# Allegro board F407_PACK_V11A.brd
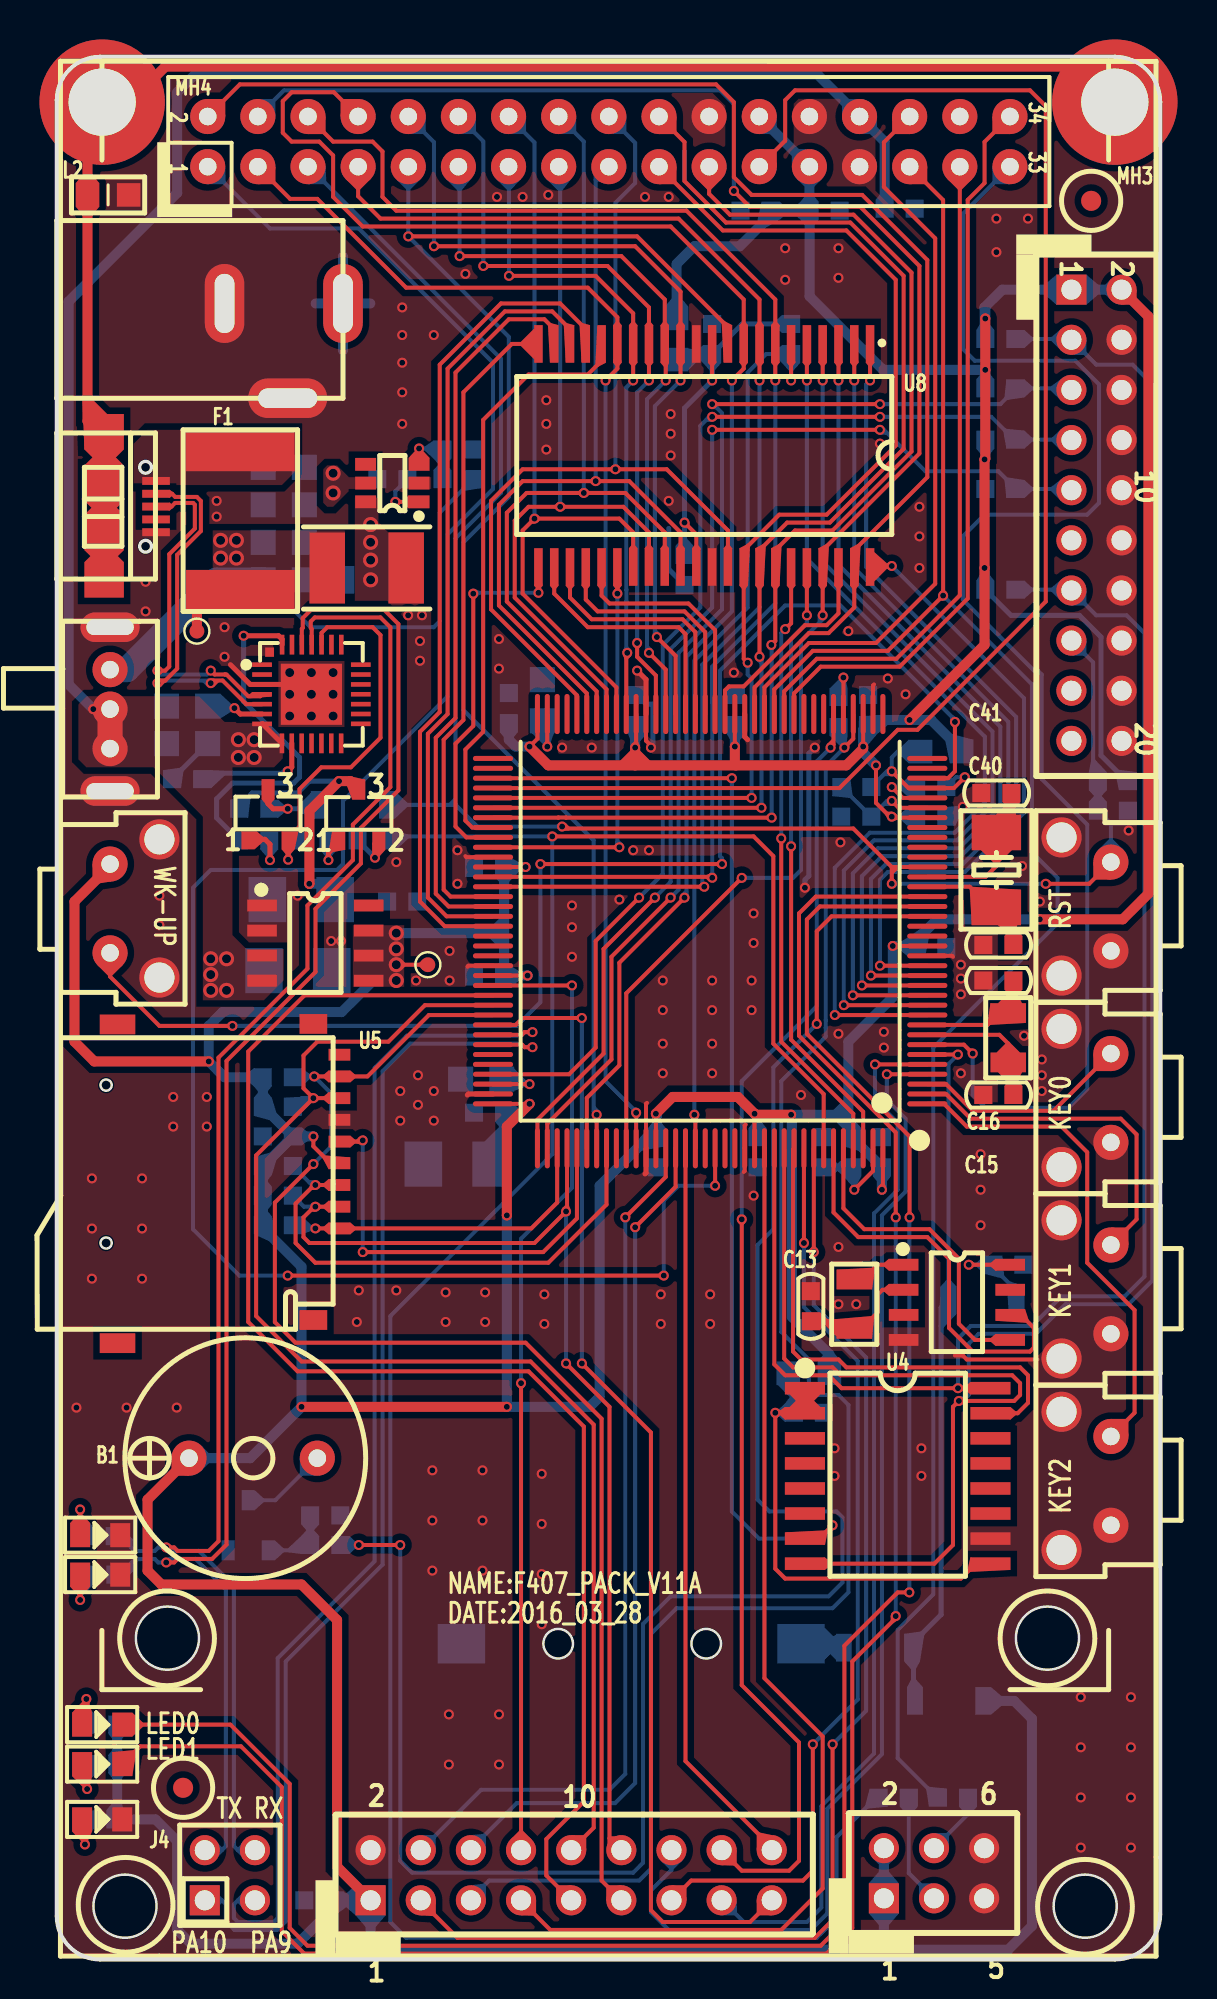
[diagram p0: board, top side]
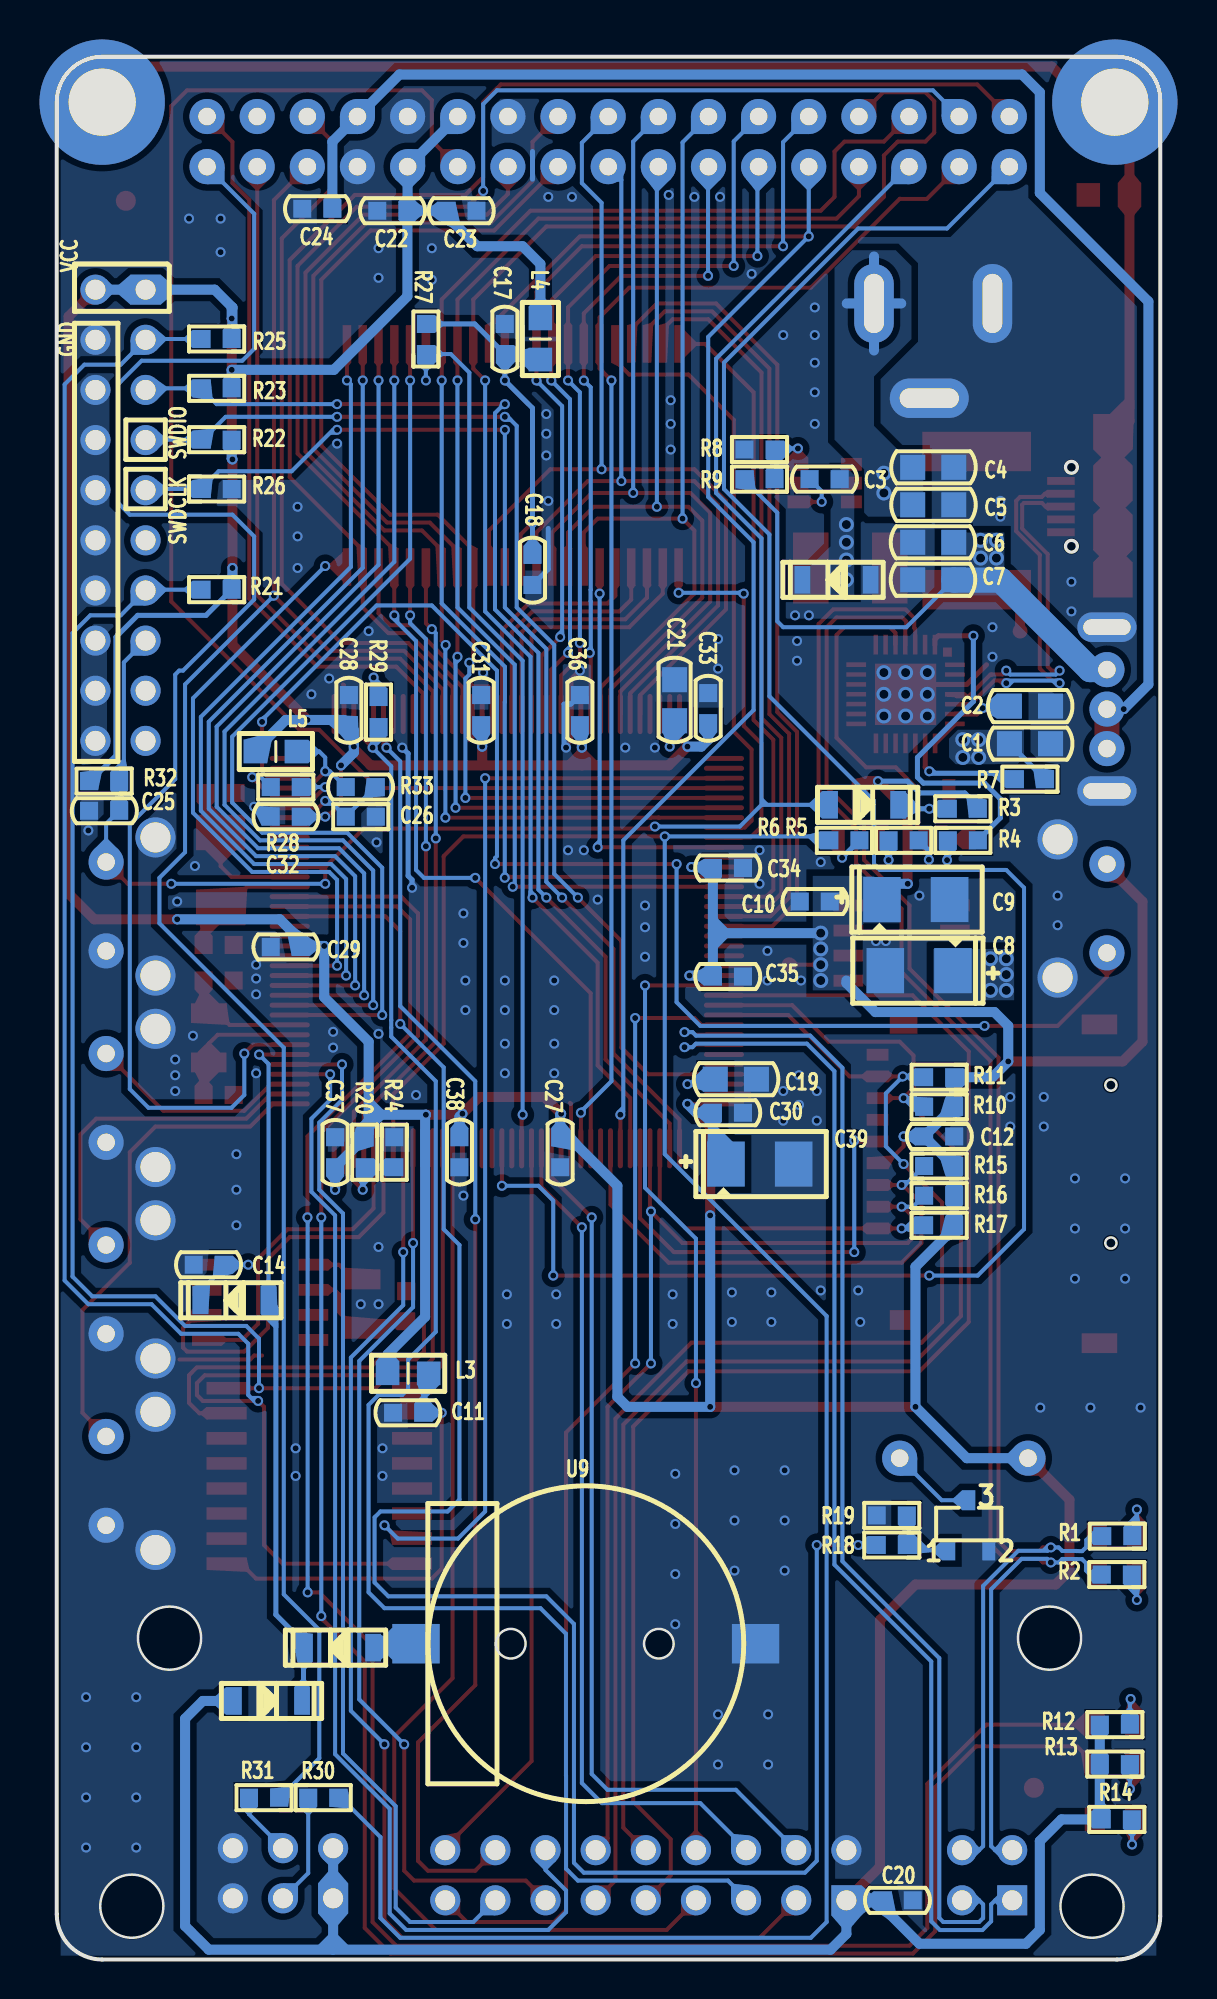
[diagram p1: board, bottom side, seen from below]

Outline 55.9 x 96.4 mm; copper layers: TOP, BOTTOM. Coordinates in mm from the lower left corner of the outline.
Outline path: 0,94.2 arc(0.64,95.76) 2.2,96.4 53.6,96.4 arc(55.23,95.73) 55.9,94.1 55.9,2.3 arc(55.23,0.67) 53.6,0 2.2,0 arc(0.64,0.64) 0,2.2 0,94.2

## Design rules (mm)
net group DP5: nets RXD TXD
net group DP10: nets PA9 PA10

## Placement (name value [footprint] x y rotation side)
B1  BEEP_HC12085P  [HC12085P]  6.7 25.4 0 top
C1  10uF_16V_0805_10%_X7R  [CC0805]  6.6 61.6 180 bottom
C2  10uF_16V_0805_10%_X7R  [CC0805]  6.6 63.5 180 bottom
C3  10nF_50V_0603_10%_X7R  [CC0603]  17 75 0 bottom
C4  10uF_16V_0805_10%_X7R  [CC0805]  11.5 75.6 180 bottom
C5  10uF_16V_0805_10%_X7R  [CC0805]  11.5 73.7 180 bottom
C6  10uF_16V_0805_10%_X7R  [CC0805]  11.5 71.8 0 bottom
C7  10uF_16V_0805_10%_X7R  [CC0805]  11.5 69.9 0 bottom
C8  10uF_10V_3528_10%  [CC3528_12]  10.5 50.1 0 bottom
C9  10uF_10V_3528_10%  [CC3528_12]  14.1 53.7 180 bottom
C10  0.1uF_50V_0603_10%_X7R  [CC0603]  17.5 53.6 180 bottom
C11  0.1uF_50V_0603_10%_X7R  [CC0603]  38.1 27.7 0 bottom
C12  0.1uF_50V_0603_10%_X7R  [CC0603]  11.2 41.7 180 bottom
C13  12pF_50V_0603_10%_X7R/NI  [CC0603]  38.2 33.1 270 top
C14  0.1uF_50V_0603_10%_X7R/NI  [CC0603]  48.2 35.2 0 bottom
C15  12pF_50V_0603_10%_C0G  [CC0603]  47.7 43.8 0 top
C16  12pF_50V_0603_10%_C0G  [CC0603]  47.7 49.6 0 top
C17  0.1uF_50V_0603_10%_X7R  [CC0603]  33.2 82.1 270 bottom
C18  0.1uF_50V_0603_10%_X7R  [CC0603]  31.8 70.4 270 bottom
C19  10uF_16V_0805_10%_X7R  [CC0805]  21.5 44.6 180 bottom
C20  0.1uF_50V_0603_10%_X7R  [CC0603]  13.3 3 0 bottom
C21  10uF_16V_0805_10%_X7R  [CC0805]  24.6 63.8 90 bottom
C22  0.1uF_50V_0603_10%_X7R  [CC0603]  38.9 88.6 180 bottom
C23  0.1uF_50V_0603_10%_X7R  [CC0603]  35.4 88.6 0 bottom
C24  0.1uF_50V_0603_10%_X7R  [CC0603]  42.7 88.7 180 bottom
C25  0.1uF_50V_0603_10%_X7R  [CC0603]  53.5 58.2 180 bottom
C26  0.1uF_50V_0603_10%_X7R  [CC0603]  40.5 59.4 0 bottom
C27  0.1uF_50V_0603_10%_X7R  [CC0603]  30.4 40.9 90 bottom
C28  0.1uF_50V_0603_10%_X7R  [CC0603]  41.1 63.3 270 bottom
C29  0.1uF_50V_0603_10%_X7R  [CC0603]  44.3 51.3 180 bottom
C30  0.1uF_50V_0603_10%_X7R  [CC0603]  21.9 42.9 0 bottom
C31  0.1uF_50V_0603_10%_X7R  [CC0603]  34.4 63.3 270 bottom
C32  0.1uF_50V_0603_10%_X7R  [CC0603]  44.3 57.9 180 bottom
C33  0.1uF_50V_0603_10%_X7R  [CC0603]  22.9 63.4 270 bottom
C34  0.1uF_50V_0603_10%_X7R  [CC0603]  21.9 55.3 0 bottom
C35  0.1uF_50V_0603_10%_X7R  [CC0603]  21.9 49.8 0 bottom
C36  0.1uF_50V_0603_10%_X7R  [CC0603]  29.4 63.3 270 bottom
C37  0.1uF_50V_0603_10%_X7R  [CC0603]  41.8 40.9 270 bottom
C38  0.1uF_50V_0603_10%_X7R  [CC0603]  35.5 40.9 90 bottom
C39  10uF_10V_3528  [CC3528_12]  22 40.3 180 bottom
C40  20pF_50V_0603_10%_C0G  [CC0603]  47.7 51.4 0 top
C41  20pF_50V_0603_10%_C0G  [CC0603]  47.6 59.1 0 top
D1  LED_GREEN_RX  [LED0805]  2.2 21.5 0 top
D2  LED_RED_TX  [LED0805]  2.2 19.5 0 top
D3  MBR0520_SOD123  [SOD123]  14.8 69.9 0 bottom
D4  LED_RED_DS0  [LED0805]  2.3 11.9 0 top
D5  LED_RED_DS1  [LED0805]  2.3 9.9 0 top
D6  LED_GREEN_POWER  [LED0805]  2.3 7.1 0 top
D7  MBR0520_SOD123  [SOD123]  45.3 33.4 0 bottom
D8  MBR0520_SOD123  [SOD123]  46.8 13.1 180 bottom
D9  MBR0520_SOD123  [SOD123]  40 15.8 0 bottom
D10  MBR0520_SOD123  [SOD123]  16.6 58.5 180 bottom
DC1  -  [DC005]  8.5 83.9 0 top
F1  JK300L  [SMD-7050]  9.3 69.4 90 top
J1  DIP2/10/2.54MM  [HEADER10X2]  51.4 84.6 270 top
J2  -  [OV2640]  15.9 3 0 top
J3  TFTLCD  [TFTLCD_3R5]  48.29 93.37 270 top
J4  CONN RCPT 2x2  [HEADER2X2]  7.5 3 0 top
J5  CONN RCPT 3x2  [HEADER3X2]  41.9 3.1 0 top
L1  6.8uH_CD4532_20%  [L4532-P]  15.7 70.5 180 top
L2  BEAD_BLM21PG600_0805  [LC0805]  2.6 89.4 0 top
L3  BEAD_BLM21PG600_0805  [LC0805]  38.1 29.7 180 bottom
L4  BEAD_BLM21PG600_0805  [LC0805]  31.4 82.1 270 bottom
L5  BEAD_BLM21PG600_0805  [LC0805]  44.8 61.2 0 bottom
MH3  Hold  [HOLD250D134]  53.6 94.1 0 top
MH4  Hold  [HOLD250D134]  2.3 94.1 0 top
MP1  MarkPoint  [MARKPOINT_R3]  6.4 8.7 0 top
MP2  MarkPoint  [MARKPOINT_R3]  52.4 89.1 0 top
NOREF  -  []  0 2.2 0 top
NOREF#2  -  []  2.6 0 90 top
Q1  8050_SOT23_NPN/NI  [SOT23_123]  10.71 58.02 0 top
Q2  8550_SOT23_PNP/NI  [SOT23_123]  15.3 58 0 top
Q3  8050_SOT23_NPN  [SOT23_123]  9.7 22 180 bottom
R1  1K_0603_1%  [RC0603]  2.18 21.45 180 bottom
R2  1K_0603_1%  [RC0603]  2.2 19.5 180 bottom
R3  10K_0603_1%/NI  [RC0603]  10 58.3 180 bottom
R4  1K_0603_1%/NI  [RC0603]  10 56.7 0 bottom
R5  1K_0603_1%/NI  [RC0603]  13 56.7 0 bottom
R6  1K_0603_1%/NI  [RC0603]  16 56.7 180 bottom
R7  10K_0603_1%  [RC0603]  6.6 59.8 180 bottom
R8  12K_0603_1%  [RC0603]  20.3 76.5 0 bottom
R9  62K_0603_1%  [RC0603]  20.3 75 180 bottom
R10  4.7K_0603_1%  [RC0603]  11.2 43.2 180 bottom
R11  4.7K_0603_1%  [RC0603]  11.2 44.7 180 bottom
R12  1K_0603_1%  [RC0603]  2.3 11.9 180 bottom
R13  1K_0603_1%  [RC0603]  2.3 9.9 180 bottom
R14  1K_0603_1%  [RC0603]  2.2 7.1 180 bottom
R15  4.7K_0603_1%  [RC0603]  11.2 40.2 0 bottom
R16  4.7K_0603_1%  [RC0603]  11.2 38.7 0 bottom
R17  4.7K_0603_1%  [RC0603]  11.2 37.2 0 bottom
R18  1K_0603_1%/NI  [RC0603]  13.6 21 180 bottom
R19  10K_0603_1%  [RC0603]  13.6 22.5 180 bottom
R20  0R_0603_1%  [RC0603]  40.3 40.9 90 bottom
R21  10K_0603_1%  [RC0603]  47.8 69.4 180 bottom
R22  10K_0603_1%  [RC0603]  47.8 77 180 bottom
R23  10K_0603_1%  [RC0603]  47.8 79.6 180 bottom
R24  0R_0603_1%/NI  [RC0603]  38.8 40.9 90 bottom
R25  10K_0603_1%  [RC0603]  47.8 82.1 180 bottom
R26  10K_0603_1%  [RC0603]  47.8 74.5 0 bottom
R27  10K_0603_1%  [RC0603]  37.2 82.1 270 bottom
R28  0R_0603_1%  [RC0603]  44.3 59.4 180 bottom
R29  0R_0603_1%/NI  [RC0603]  39.6 63.2 270 bottom
R30  10K_0603_1%  [RC0603]  42.4 8.2 0 bottom
R31  10K_0603_1%  [RC0603]  45.4 8.2 180 bottom
R32  20K_0603_1%  [RC0603]  53.5 59.7 180 bottom
R33  0R_0603_1%  [RC0603]  40.5 57.9 180 bottom
SW1  -  [SWITCH_3P]  2.7 67.5 270 top
SW2  WK_UP  [SW-6X6X6-L]  2.7 55.5 270 top
SW3  KEY0  [SW-6X6X6-L]  53.4 41.4 90 top
SW4  KEY1  [SW-6X6X6-L]  53.4 31.7 90 top
SW5  KEY2  [SW-6X6X6-L]  53.4 22 90 top
SW6  RST  [SW-6X6X6-L]  53.4 51.1 90 top
TP1  TestPoint  [TP-0R75]  7.1 67.3 0 top
TP2  TestPoint  [TP-0R75]  18.8 50.4 0 top
U1  CP2102  [QFN-28]  10.4 65.6 0 top
U2  RT8259  [SOT23-6]  17 74.8 90 top
U3  TPS76833Q  [SOIC8]  13.1 51.5 270 top
U4  W25Q128FVFIG  [SOIC16W]  42.6 24.5 0 top
U5  -  [TFCARD]  14 39.3 270 top
U6  PCF8563/NI  [SOIC8]  45.6 33.3 270 top
U7  STM32F407ZGT6  [LQFP144]  33.1 52.1 180 top
U8  IS62WV51216  [TSOP-44]  32.8 76.2 270 top
U9  BATTERY  [CR1220]  21.7 16 0 bottom
USB1  USB-MICRO_USB232  [USB-MICRO]  5.1 73.6 270 top
X1  XTAL_32768Hz_3215/NI  [X-2P-3R2X1R5-SMD]  40.4 33.2 90 top
X2  XTAL_32768Hz_3215  [X-2P-3R2X1R5-SMD]  48.2 46.7 270 top
X3  XTAL_8MHz_5062  [X-2P-5R0X3R2-SMD]  47.6 55.2 270 top

## Library data of the parts
B1 = BEEP_HC12085P
C1-C7 = CAPACITOR NON-POL
C8 C9 C39 = CAPT_100UF_3528_6r3V_10%_LXXXX
C10-C12 C14-C18 C20 C22-C38 C40 C41 = CAP NP
C13 = CAP
C19 C21 = C_Generic
D1 D2 D4-D6 = LED_4
D3 D8 D9 = DIODE13_0
D7 D10 = D SCHOTTKY
DC1 = DC005
F1 = FUSE
J1 = CON20_3
J2 = CONN RCPT 9x2
J3 = CONN RCPT 17x2_1
J4 = CONN RCPT 2x2
J5 = CONN RCPT 3x2
L1 L2 L4 = IND_BEAD_0805_600OHM_200MA
L3 L5 = INDUCTOR
MH3 MH4 = Hold_1
MP1 MP2 = MarkPoint
Q1 Q3 = L14G1/TO_1
Q2 = L14G1/TO_0
R1-R31 R33 = R_10k_0603
R32 = R_Generic
SW1 = SWITCH_3P
SW2-SW6 = SWITCH-SPST-4P
TP1 TP2 = TestPoint_0
U1 = CP2102
U2 = RT8259
U3 = TPS7133_0
U4 = W25Q64_0
U5 = TFCARD_1
U6 = PCF8563
U7 = STM32F407ZGT6_0
U8 = IS61LV25626_0
U9 = BATTERY
USB1 = USB-MICRO
X1 = XTAL
X2 X3 = XTAL_5032_0

## Footprints (pads in the part's own frame, mm; a bottom-side part is the same pattern mirrored in y, then rotated)
CC0603
  rect 0.914x0.914 smd: 1(-0.762,0) 2(0.762,0)
CC0805
  rect 1.27x1.27 smd: 1(-1.041,0) 2(1.041,0)
CC3528_12
  rect 1.905x2.286 smd: 1(0,0) 2(3.429,0)
CR1220
  rect 2.4x2 smd: 1(16,0) 2(-1.2,0)
DC005
  oval 2x4 hole 1x3: 1(6,0) 2(0,0)
  oval 4x2 hole 3x1: 3(3.2,-4.8)
HC12085P
  round 1.778 hole 0.889: 1(0,0) 2(6.5,0)
HEADER2X2
  rect 1.524x1.524 hole 1.016: 1(0,0)
  round 1.524 hole 1.016: 2(0,2.54) 3(2.54,0) 4(2.54,2.54)
HEADER3X2
  rect 1.524x1.524 hole 1.016: 1(0,0)
  round 1.524 hole 1.016: 2(0,2.54) 3(2.54,0) 4(2.54,2.54) 5(5.08,0) 6(5.08,2.54)
HEADER10X2
  rect 1.524x1.524 hole 1.016: 1(0,0)
  round 1.524 hole 1.016: 2(0,2.54) 3(2.54,0) 4(2.54,2.54) 5(5.08,0) 6(5.08,2.54) 7(7.62,0) 8(7.62,2.54) 9(10.16,0) 10(10.16,2.54) 11(12.7,0) 12(12.7,2.54) 13(15.24,0) 14(15.24,2.54) 15(17.78,0) 16(17.78,2.54) 17(20.32,0) 18(20.32,2.54) 19(22.86,0) 20(22.86,2.54)
HOLD250D134
  round 6.35 hole 3.404: 1(0,0)
L4532-P
  rect 1.8x3.6 smd: 1(-2,0) 2(2,0)
LC0805
  rect 1.194x1.194 smd: 1(-1.041,0) 2(1.041,0)
LED0805
  rect 1.016x1.219 smd: 1(-1.016,0) 2(1.016,0)
LQFP144
  oval 2.032x0.254 smd: 1(-11,8.75) 2(-11,8.25) 3(-11,7.75) 4(-11,7.25) 5(-11,6.75) 6(-11,6.25) 7(-11,5.75) 8(-11,5.25) 9(-11,4.75) 10(-11,4.25) 11(-11,3.75) 12(-11,3.25) 13(-11,2.75) 14(-11,2.25) 15(-11,1.75) 16(-11,1.25) 17(-11,0.75) 18(-11,0.25) 19(-11,-0.25) 20(-11,-0.75) 21(-11,-1.25) 22(-11,-1.75) 23(-11,-2.25) 24(-11,-2.75) 25(-11,-3.25) 26(-11,-3.75) 27(-11,-4.25) 28(-11,-4.75) 29(-11,-5.25) 30(-11,-5.75) 31(-11,-6.25) 32(-11,-6.75) 33(-11,-7.25) 34(-11,-7.75) 35(-11,-8.25) 36(-11,-8.75) 73(11,-8.75) 74(11,-8.25) 75(11,-7.75) 76(11,-7.25) 77(11,-6.75) 78(11,-6.25) 79(11,-5.75) 80(11,-5.25) 81(11,-4.75) 82(11,-4.25) 83(11,-3.75) 84(11,-3.25) 85(11,-2.75) 86(11,-2.25) 87(11,-1.75) 88(11,-1.25) 89(11,-0.75) 90(11,-0.25) 91(11,0.25) 92(11,0.75) 93(11,1.25) 94(11,1.75) 95(11,2.25) 96(11,2.75) 97(11,3.25) 98(11,3.75) 99(11,4.25) 100(11,4.75) 101(11,5.25) 102(11,5.75) 103(11,6.25) 104(11,6.75) 105(11,7.25) 106(11,7.75) 107(11,8.25) 108(11,8.75)
  oval 0.254x2.032 smd: 37(-8.75,-11) 38(-8.25,-11) 39(-7.75,-11) 40(-7.25,-11) 41(-6.75,-11) 42(-6.25,-11) 43(-5.75,-11) 44(-5.25,-11) 45(-4.75,-11) 46(-4.25,-11) 47(-3.75,-11) 48(-3.25,-11) 49(-2.75,-11) 50(-2.25,-11) 51(-1.75,-11) 52(-1.25,-11) 53(-0.75,-11) 54(-0.25,-11) 55(0.25,-11) 56(0.75,-11) 57(1.25,-11) 58(1.75,-11) 59(2.25,-11) 60(2.75,-11) 61(3.25,-11) 62(3.75,-11) 63(4.25,-11) 64(4.75,-11) 65(5.25,-11) 66(5.75,-11) 67(6.25,-11) 68(6.75,-11) 69(7.25,-11) 70(7.75,-11) 71(8.25,-11) 72(8.75,-11) 109(8.75,11) 110(8.25,11) 111(7.75,11) 112(7.25,11) 113(6.75,11) 114(6.25,11) 115(5.75,11) 116(5.25,11) 117(4.75,11) 118(4.25,11) 119(3.75,11) 120(3.25,11) 121(2.75,11) 122(2.25,11) 123(1.75,11) 124(1.25,11) 125(0.75,11) 126(0.25,11) 127(-0.25,11) 128(-0.75,11) 129(-1.25,11) 130(-1.75,11) 131(-2.25,11) 132(-2.75,11) 133(-3.25,11) 134(-3.75,11) 135(-4.25,11) 136(-4.75,11) 137(-5.25,11) 138(-5.75,11) 139(-6.25,11) 140(-6.75,11) 141(-7.25,11) 142(-7.75,11) 143(-8.25,11) 144(-8.75,11)
MARKPOINT_R3
  round 1.016 smd: 1(0,0)
OV2640
  rect 1.524x1.524 hole 1.016: 1(0,0)
  round 1.524 hole 1.016: 2(0,2.54) 3(2.54,0) 4(2.54,2.54) 5(5.08,0) 6(5.08,2.54) 7(7.62,0) 8(7.62,2.54) 9(10.16,0) 10(10.16,2.54) 11(12.7,0) 12(12.7,2.54) 13(15.24,0) 14(15.24,2.54) 15(17.78,0) 16(17.78,2.54) 17(20.32,0) 18(20.32,2.54)
QFN-28
  rect 1x0.23 smd: 1(0,0) 2(0,-0.5) 3(0,-1) 4(0,-1.5) 5(0,-2) 6(0,-2.5) 7(0,-3) 15(5.003,-2.998) 16(5.003,-2.498) 17(5.003,-1.998) 18(5.003,-1.498) 19(5.003,-0.998) 20(5.003,-0.498) 21(5.003,0.002)
  rect 0.23x1 smd: 8(1.006,-3.987) 9(1.506,-3.987) 10(2.006,-3.987) 11(2.506,-3.987) 12(3.006,-3.987) 13(3.506,-3.987) 14(4.006,-3.987) 22(4.014,1.016) 23(3.514,1.016) 24(3.014,1.016) 25(2.514,1.016) 26(2.014,1.016) 27(1.514,1.016) 28(1.014,1.016)
  rect 0.45x0.47 smd: 29(0.381,0.635)
  rect 3.1x3.1 smd: 30(2.5,-1.5)
RC0603
  rect 0.914x0.914 smd: 1(-0.762,0) 2(0.762,0)
SMD-7050
  rect 2x5.5 smd: 1(0,0) 2(7,0)
SOD123
  rect 0.8x1.4 smd: 1(-0.127,0) 2(3.327,0)
SOIC8
  rect 0.6x1.5 smd: 1(-1.9,-2.7) 2(-0.63,-2.7) 3(0.64,-2.7) 4(1.91,-2.7) 5(1.91,2.7) 6(0.64,2.7) 7(-0.63,2.7) 8(-1.9,2.7)
SOIC16W
  rect 2.032x0.635 smd: 1(-4.699,4.445) 2(-4.699,3.175) 3(-4.699,1.905) 4(-4.699,0.635) 5(-4.699,-0.635) 6(-4.699,-1.905) 7(-4.699,-3.175) 8(-4.699,-4.445) 9(4.699,-4.445) 10(4.699,-3.175) 11(4.699,-1.905) 12(4.699,-0.635) 13(4.699,0.635) 14(4.699,1.905) 15(4.699,3.175) 16(4.699,4.445)
SOT23-6
  rect 0.65x1.06 smd: 1(-0.95,-1.354) 2(0,-1.354) 3(0.95,-1.354) 4(0.95,1.354) 5(0,1.354) 6(-0.95,1.354)
SOT23_123
  rect 0.66x1.016 smd: 1(-1.016,-1.27) 2(1.016,-1.27) 3(0,1.27)
SW-6X6X6-L
  round 2.032 hole 1.524: 1(-1.25,2.5) 4(5.75,2.5)
  round 1.778 hole 0.889: 2(0,0) 3(4.5,0)
SWITCH_3P
  oval 1.5x3 hole 0.8x2.4: 1(0,0) 5(8.3,0)
  round 1.778 hole 0.889: 2(2.15,0) 3(4.15,0) 4(6.15,0)
TFCARD
  rect 0.6x1.1 smd: 1(2.26,0.32) 2(1.16,0.32) 3(0.06,0.32) 4(-1.04,0.32) 5(-2.14,0.32) 6(-3.24,0.32) 7(-4.34,0.32) 8(-5.44,0.32) 9(-6.54,0.32)
  rect 1x1.4 smd: 10(-8.1,-1) 13(6.9,-1)
  rect 1x1.8 smd: 11(-8.074,-10.922) 12(8.074,-10.922)
TFTLCD_3R5
  round 1.778 hole 0.889: 1(2.54,-40.64) 2(0,-40.64) 3(2.54,-38.1) 4(0,-38.1) 5(2.54,-35.56) 6(0,-35.56) 7(2.54,-33.02) 8(0,-33.02) 9(2.54,-30.48) 10(0,-30.48) 11(2.54,-27.94) 12(0,-27.94) 13(2.54,-25.4) 14(0,-25.4) 15(2.54,-22.86) 16(0,-22.86) 17(2.54,-20.32) 18(0,-20.32) 19(2.54,-17.78) 20(0,-17.78) 21(2.54,-15.24) 22(0,-15.24) 23(2.54,-12.7) 24(0,-12.7) 25(2.54,-10.16) 26(0,-10.16) 27(2.54,-7.62) 28(0,-7.62) 29(2.54,-5.08) 30(0,-5.08) 31(2.54,-2.54) 32(0,-2.54) 33(2.54,0) 34(0,0)
TP-0R75
  round 0.75 smd: 1(0,0)
TSOP-44
  rect 1.905x0.432 smd: 1(-5.65,8.4) 2(-5.65,7.6) 3(-5.65,6.8) 4(-5.65,6) 5(-5.65,5.2) 6(-5.65,4.4) 7(-5.65,3.6) 8(-5.65,2.8) 9(-5.65,2) 10(-5.65,1.2) 11(-5.65,0.4) 12(-5.65,-0.4) 13(-5.65,-1.2) 14(-5.65,-2) 15(-5.65,-2.8) 16(-5.65,-3.6) 17(-5.65,-4.4) 18(-5.65,-5.2) 19(-5.65,-6) 20(-5.65,-6.8) 21(-5.65,-7.6) 22(-5.65,-8.4) 23(5.65,-8.4) 24(5.65,-7.6) 25(5.65,-6.8) 26(5.65,-6) 27(5.65,-5.2) 28(5.65,-4.4) 29(5.65,-3.6) 30(5.65,-2.8) 31(5.65,-2) 32(5.65,-1.2) 33(5.65,-0.4) 34(5.65,0.4) 35(5.65,1.2) 36(5.65,2) 37(5.65,2.8) 38(5.65,3.6) 39(5.65,4.4) 40(5.65,5.2) 41(5.65,6) 42(5.65,6.8) 43(5.65,7.6) 44(5.65,8.4)
USB-MICRO
  rect 0.4x1.4 smd: 1(-1.31,-0.07) 2(-0.66,-0.07) 3(-0.01,-0.07) 4(0.64,-0.07) 5(1.29,-0.07)
  rect 1.8x2 smd: 6(-3.8,-2.7) 7(-1.2,-2.7) 8(1.3,-2.7) 9(3.7,-2.7)
X-2P-3R2X1R5-SMD
  rect 1x1.8 smd: 1(-1.25,0) 2(1.25,0)
X-2P-5R0X3R2-SMD
  rect 1.8x2.5 smd: 1(-1.9,0) 2(1.9,0)

## Nets
GND: C1.2 C2.2 C4.2 C5.2 C6.2 C7.2 C8.2 C9.2 C10.1 C11.2 C12.2 C13.1 C14.2 C15.1 C16.1 C17.1 C18.2 C19.2 C20.1 C21.2 C22.1 C23.1 C24.1 C25.1 C27.1 C28.1 C29.1 C30.1 C31.1 C32.1 C33.1 C34.1 C35.1 C36.1 C37.1 C38.1 C39.2 C40.1 C41.1 D1.2(CATHODE) D2.2(CATHODE) D3.1 D6.2(CATHODE) DC1.2 DC1.3 J1.4 J1.6 J1.8 J1.10 J1.12 J1.14 J1.16 J1.18 J1.20 J2.2(10) J3.22(GND_3) J3.26(GND_2) J3.27(GND_1) J5.5 J5.6 L2.2(B) Q3.2(E) R8.2 R19.1 R24.2 R26.1 R33.2 SW1.1 SW1.5 SW2.1 SW2.4 SW3.1 SW3.2 SW3.4 SW4.1 SW4.2 SW4.4 SW5.1 SW5.2 SW5.4 SW6.1 SW6.2 SW6.4 U1.3(GND_1) U1.29(GND_2) U1.30(GND_3) U2.2(GND) U3.1(GND) U3.2(E\N\) U4.10(GND) U5.6(GND) U6.4(VSS) U7.16(VSS_1) U7.38(VSS_2) U7.51(VSS_3) U7.61(VSS_4) U7.83(VSS_5) U7.94(VSS_6) U7.107(VSS_7) U7.120(VSS_8) U7.130(VSS_9) U8.12(GND_1) U8.34(GND_2) U9.2 USB1.5(GND)
GND_EARTH: L2.1(A) MH3.1 MH4.1 USB1.6(P_2) USB1.7(P_1) USB1.8(P_3) USB1.9(P_4)
VCC_3V3: B1.1(P) C9.1 C10.2 C12.1 C20.2 C22.2 C23.2 C27.2 C28.2 C29.2 C30.2 C31.2 C32.2 C33.2 C34.2 C35.2 C36.2 C37.2 C38.2 C39.1 D8.1 J1.1 J1.2 J2.1 J3.24(VDD_2) J3.25(VDD_1) J5.1 J5.2 L3.1 L4.1(A) L5.2 Q2.3(C) R3.2 R10.2 R11.2 R12.1 R13.1 R14.1 R15.1 R16.1 R17.1 R20.2 R21.2 R22.2 R23.2 R25.2 R32.1 SW2.2 TP2.1 U3.5(OUT_2) U3.6(OUT_1) U3.7(SENSE) U5.4(VCC) U7.17(VDD_1) U7.30(VDD_2) U7.39(VDD_3) U7.52(VDD_4) U7.62(VDD_5) U7.72(VDD_6) U7.84(VDD_7) U7.95(VDD_8) U7.108(VDD_9) U7.121(VDD_10) U7.131(VDD_11) U7.144(VDD_12)
VCC_5V: C1.1 C8.1 C24.2 J3.28(BL_VDD) R7.2 SW1.3 SW1.4 U1.7(REGIN) U1.8(VBUS) U3.3(IN_1) U3.4(IN_2)
VCC_5VOUT: C6.1 C7.1 F1.1 L1.2(B) R9.1 SW1.2 TP1.1
VCC_VBAT: D7.1 D8.2 D9.2 U7.6(VBAT)
VCC_VDDA: C26.2 L5.1 R28.1 U7.33(VDDA)
VCC_VUSB: F1.2 USB1.1(VBUS)
VSSA: C26.1 R33.1 U7.31(VSSA)
BEEP: R18.1 U7.20(PF8)
BOOT0: R6.1 R30.1 U7.138(BOOT0)
BOOT1: J3.29(MISO) R31.2 U7.48(PB2/BOOT1 (PB2))
DCMI_D0: J2.8(13) U7.96(PC6)
DCMI_D1: J2.9(5) U7.97(PC7)
DCMI_D5: J2.13(7) U7.136(PB6)
DCMI_D6: J2.14(16) U7.4(PE5)
DCMI_D7: J2.15(8) U7.5(PE6)
DCMI_HREF: J2.5(3) R29.2 U7.40(PA4)
DCMI_PCLK: J2.16(17) U7.42(PA6)
DCMI_PWDN: J2.18 U7.124(PG9)
DCMI_RESET: J2.7(4) U7.132(PG15)
DCMI_SCL: J2.4(11) U7.122(PD6)
DCMI_SDA: J2.6(12) U7.123(PD7)
DCMI_VSYNC: J2.3(2) U7.137(PB7)
DCMI_XCLK: J2.17(9) U7.100(PA8)
DTR: R4.1 U1.28(DTR)
FSMC_A0: U7.10(PF0) U8.5(A0)
FSMC_A1: U7.11(PF1) U8.4(A1)
FSMC_A2: U7.12(PF2) U8.3(A2)
FSMC_A3: U7.13(PF3) U8.2(A3)
FSMC_A4: U7.14(PF4) U8.1(A4)
FSMC_A5: U7.15(PF5) U8.44(A5)
FSMC_A6: J3.2(RS) U7.50(PF12) U8.43(A6)
FSMC_A7: U7.53(PF13) U8.42(A7)
FSMC_A8: U7.54(PF14) U8.27(A8)
FSMC_A9: U7.55(PF15) U8.26(A9)
FSMC_A10: U7.56(PG0) U8.25(A10)
FSMC_A11: U7.57(PG1) U8.24(A11)
FSMC_A12: U7.87(PG2) U8.22(A12)
FSMC_A13: U7.88(PG3) U8.21(A13)
FSMC_A14: U7.89(PG4) U8.20(A14)
FSMC_A15: U7.90(PG5) U8.19(A15)
FSMC_A16: U7.80(PD11) U8.18(A16)
FSMC_A17: U7.81(PD12) U8.23(A17)
FSMC_A18: U7.82(PD13) U8.28(A18)
FSMC_D0: J3.6(D0) U7.85(PD14) U8.7(I/O0)
FSMC_D1: J3.7(D1) U7.86(PD15) U8.8(I/O1)
FSMC_D2: J3.8(D2) U7.114(PD0) U8.9(I/O2)
FSMC_D3: J3.9(D3) U7.115(PD1) U8.10(I/O3)
FSMC_D4: J3.10(D4) U7.58(PE7) U8.13(I/O4)
FSMC_D5: J3.11(D5) U7.59(PE8) U8.14(I/O5)
FSMC_D6: J3.12(D6) U7.60(PE9) U8.15(I/O6)
FSMC_D7: J3.13(D7) U7.63(PE10) U8.16(I/O7)
FSMC_D8: J3.14(D8) U7.64(PE11) U8.29(I/O8)
FSMC_D9: J3.15(D9) U7.65(PE12) U8.30(I/O9)
FSMC_D10: J3.16(D10) U7.66(PE13) U8.31(I/O10)
FSMC_D11: J3.17(D11) U7.67(PE14) U8.32(I/O11)
FSMC_D12: J3.18(D12) U7.68(PE15) U8.35(I/O12)
FSMC_D13: J3.19(D13) U7.77(PD8) U8.36(I/O13)
FSMC_D14: J3.20(D14) U7.78(PD9) U8.37(I/O14)
FSMC_D15: J3.21(D15) U7.79(PD10) U8.38(I/O15)
FSMC_NBL0: U7.141(PE0) U8.39(L\B\)
FSMC_NBL1: U7.142(PE1) U8.40(U\B\)
FSMC_NE3: R27.2 U7.125(PG10) U8.6(C\S\1\)
FSMC_NE4: J3.1(LCD_CS) U7.127(PG12)
FSMC_NOE: J3.4(RD) U7.118(PD4) U8.41(O\E\)
FSMC_NWE: J3.3(WR/CLK) U7.119(PD5) U8.17(W\E\)
IIC_SCL: U6.6(SCL) U7.139(PB8)
IIC_SDA: U6.5(SDA) U7.140(PB9)
JTAG_TCLK: J1.9 R26.2 U7.109(PA14 (JTCK/SWCLK))
JTAG_TDI: J1.5 R23.1 U7.110(PA15 (JTDI))
JTAG_TMS: J1.7 R22.1 U7.105(PA13 (JTMS-SWDIO))
KEY0: SW3.3 U7.3(PE4)
KEY1: SW4.3 U7.2(PE3)
KEY2: SW5.3 U7.1(PE2)
LCD_BL: J3.23(BL) U7.76(PB15)
LED0: D4.2(CATHODE) U7.21(PF9)
LED1: D5.2(CATHODE) U7.22(PF10)
NRST: C25.2 D10.1 J1.15 J3.5(RST) R32.2 SW6.3 U7.25(NRST)
PA5: R29.1 U7.41(PA5)
PA9: J4.3 U7.101(PA9)
PA10: J4.1 U7.102(PA10)
PB0: J3.34(CLK) U7.46(PB0)
PB1: J3.31(T_PEN) U7.47(PB1)
PC13: J3.33(T_CS) U7.7(PC13)
PC14: C15.2 U7.8(PC14/OSC32_IN (PC14)) X2.2
PC15: C16.2 U7.9(PC15/ OSC32_OUT (PC15)) X2.1
PF11: J3.30(MOSI) U7.49(PF11)
RTS: Q1.2(E) R5.1 U1.24(RTS)
RXD: J4.4 R1.1 U1.25(RXD)
SDIO_CLK: U5.5(CLK) U7.113(PC12)
SDIO_CMD: R15.2 U5.3(CMD) U7.116(PD2)
SDIO_D0: J2.10(14) R10.1 U5.7(DAT0) U7.98(PC8)
SDIO_D1: J2.11(6) R11.1 U5.8(DAT1) U7.99(PC9)
SDIO_D2: R17.2 U5.1(DAT2) U7.111(PC10)
SDIO_D3: J2.12(15) R16.2 U5.2(DAT3) U7.112(PC11)
TXD: J4.2 R2.1 U1.26(TXD)
VREF+: R28.2 U7.32(VREF+)
W25QXX_CS: U4.7(C\S\) U7.75(PB14)
W25QXX_SPI_CLK: J1.13 R21.1 U4.16(CLK) U7.133(PB3 (JTDO/)
W25QXX_SPI_MISO: J1.3 R25.1 U4.8(DO) U7.134(PB4 (NJTRST))
W25QXX_SPI_MOSI: U4.15(DI) U7.135(PB5)
WK_UP: SW2.3 U7.34(PA0/WKUP (PA0))
N10964059: C13.2 U6.2(OSCO) X1.1
N11517045: C40.2 U7.23(PH0/OSC_IN (PH0)) X3.2
N11517097: C41.2 U7.24(PH1/OSC_OUT (PH1)) X3.1
N11518043: R20.1 R24.1 U7.143(PDR_ON)
N11518115: C19.1 U7.106(VCAP_2)
N11524608: C17.2 C18.1 L4.2(B) R27.1 U8.11(VDD_1) U8.33(VDD_2)
N11556832: U6.1(OSCI) X1.2
N11557131: C14.1 D7.2 U6.8(VDD)
N11560624: D4.1(ANODE) R12.2
N11560628: D5.1(ANODE) R13.2
N11560632: D6.1(ANODE) R14.2
N11623966: C21.1 U7.71(VCAP_1)
N11629153: C4.1 C5.1 DC1.1 U2.5(VIN)
N11629321: C3.1 D3.2 L1.1(A) U2.6(PHASE)
N11629345: R8.1 R9.2 U2.3(FB)
N11637754: U1.4(D+) USB1.3(D+)
N11637758: U1.5(D-) USB1.2(D-)
N11638713: C2.1 U1.6(VDD)
N11638764: R7.1 U1.9(R\S\T\)
N11638791: D1.1(ANODE) R1.2
N11764026: C11.1 L3.2 U4.1(H\O\L\D\) U4.2(VCC) U4.9(W\P\)
N11774127: D2.1(ANODE) R2.2
N11779339: Q3.1(B) R18.2 R19.2
N11779536: B1.2(G) Q3.3(C)
N11799005: Q1.1(B) R4.2
N11799595: Q2.1(B) R5.2
N11799717: Q2.2(E) R6.2
N11824757: D10.2 Q1.3(C) R3.1
N115355290: J5.4 R31.1
N115355295: J5.3 R30.2
N116292693: C3.2 U2.1(BOOT)
N117249130: D9.1 U9.1

Pads without a net: J1 11 17 19; J3 32; MP1 1; MP2 1; U1 1 2 10 11 12 13 14 15 16 17 18 19 20 21 22 23 27; U2 4; U3 8; U4 3 4 5 6 11 12 13 14; U5 9 10 11 12 13; U6 3 7; U7 18 19 26 27 28 29 35 36 37 43 44 45 69 70 73 74 91 92 93 103 104 117 126 128 129; USB1 4

## Via types
v1: diameter 0.508, hole 0.305, TOP to BOTTOM, 343 vias
v2: diameter 0.762, hole 0.457, TOP to BOTTOM, 32 vias

## Routing (per net, layer and track width the routed paths; a pad name or vN(x,y) marks a point on that pad's centre or on a via; arc(x,y) is an arc through that point)
GND: length 43.6
  TOP w0.203: 30,61.6 29.85,61.75 U7.61 ; 45.5,30.6 45.9,30.6 46.1,30.4 49.68,30.4 ; 29.9,43.4 29.85,43.35 U7.120 ; 20.8,50.3 20.85,50.35 U7.94 ; 45.4,50.8 45.35,50.85 U7.16 ; 34.8,39.9 34.85,39.95 U7.130 34.85,42.25 34.9,42.3 ; U7.38 41.35,64.55 41.4,64.6 ; U7.83 20.75,55.85 20.7,55.9
  TOP w0.254: 35,61.8 34.85,61.95 U7.51 ; 8.8,65.6 9.8,64.6 U1.3 12.4,64.6 v2(12.9,64.1) ; v1(29.4,65.3) 29.85,64.85 U7.61 ; 20.8,43.8 20.85,43.85 U7.107 ; U7.120 29.85,39.85 29.8,39.8
  BOTTOM w0.203: 46,58.5 v1(45.9,58.4) 45.4,57.9 C32.1
  BOTTOM w0.254: 31,72.5 31,70.44 C18.2 ; v1(37.9,54.3) 37.9,54.7 38.1,54.9 38.1,61.1 v1(38.4,61.4) ; C36.1 29.86,63.6 30.2,63.6 30.2,61.5 v1(30.1,61.4) ; 31.8,91.6 31.8,90.2
  vias: v1(1,27.96) v1(1.78,39.57) v1(1.78,37.03) v1(1.78,34.49) v1(3.54,27.96) v1(4.32,39.57) v1(4.32,37.03) v1(4.32,34.49) v1(4.5,69.8) v1(4.5,68.3) v1(5.2,53.9) v1(5.2,52.4) v1(5.9,43.7) v1(5.9,42.2) v1(6.08,27.96) v1(7.6,43.7) v1(7.6,42.2) v1(8.1,73.9) v1(8.1,73.1) v1(8.5,67.5) v1(8.5,66) v1(12.2,53.9) v1(13.9,51.6) v1(14.4,51.6) v1(15.2,32.3) v1(15.3,33.9) v1(17.2,55.6) v1(17.2,33.9) v1(17.4,44) v1(17.4,42.5) v1(17.5,83.7) v1(17.5,82.3) v1(17.5,80.9) v1(17.5,79.4) v1(17.5,77.8) v1(17.8,68.1) v1(18.2,49.6) v1(18.3,44.8) v1(18.3,43.3) v1(18.4,66.8) v1(18.4,65.8) v1(18.5,68.1) v1(19.03,24.78) v1(19.03,22.24) v1(19.03,19.7) v1(19.1,82.3) v1(19.1,44) v1(19.1,42.5) v1(19.7,33.8) v1(19.7,32.3) v1(19.9,51.1) v1(19.9,49.6) v1(19.86,12.42) v1(19.86,9.88) v1(20.3,56.2) v1(20.3,54.5) v1(20.7,85.4) v1(21.57,24.78) v1(21.57,22.24) v1(21.57,19.7) v1(21.7,33.8) v1(21.7,32.3) v1(22.3,89.3) v1(22.4,66.9) v1(22.4,65.4) v1(22.4,12.42) v1(22.4,9.88) v1(23.6,89.3) v1(24.57,24.61) v1(24.57,22.07) v1(24.57,19.53) v1(24.57,16.99) v1(24.7,33.7) v1(24.7,32.2) v1(24.8,79) v1(24.8,77.8) v1(24.8,76.5) v1(24.9,89.4) v1(25.6,61.4) v1(26.1,53.4) v1(26.1,52.3) v1(26.1,50.8) v1(27.1,61.4) v1(28.5,53.7) v1(29.2,56.2) v1(29.8,89.3) v1(30,56.2) v1(30.6,33.7) v1(30.6,32.2) v1(30.7,49.6) v1(30.7,48.1) v1(30.7,46.4) v1(30.7,44.9) v1(31,89.3) v1(31,73.9) v1(31.1,78.3) v1(31.1,77.3) v1(31.1,76.2) v1(33.1,33.7) v1(33.1,32.2) v1(33.2,49.6) v1(33.2,48.1) v1(33.2,46.4) v1(33.2,44.9) v1(34.3,65.2) v1(35.2,49.6) v1(35.2,48.1) v1(35.3,53) v1(35.3,51.5) v1(35.3,38.7) v1(36.9,86.7) v1(36.9,85.1) v1(37.7,43.8) v1(39.4,25.9) v1(39.4,24.5) v1(39.6,86.7) v1(39.6,85.2) v1(39.6,46.9) v1(39.6,36.1) v1(39.6,33.2) v1(39.7,56.6) v1(40.1,67.3) v1(40.5,33.2) v1(41.7,76.8) v1(41.9,47) v1(41.9,46.2) v1(42.1,64.9) v1(43,64.1) v1(43.7,73.6) v1(43.7,72.1) v1(43.7,70.5) v1(43.8,25.9) v1(43.8,24.5) v1(45.8,50.4) v1(45.8,49.7) v1(45.8,48.9) v1(45.8,44.9) v1(46.8,40.8) v1(46.8,39) v1(46.8,37.2) v1(47.6,88.2) v1(47.6,86.5) v1(48.9,55.4) v1(49,46.8) v1(49.2,88.2) v1(49.8,53.6) v1(49.9,45.6) v1(49.9,44.8) v1(49.9,44) v1(51.87,13.29) v1(51.87,10.75) v1(51.87,8.21) v1(51.87,5.67) v1(54.3,57.2) v1(54.41,13.29) v1(54.41,10.75) v1(54.41,8.21) v1(54.41,5.67) v2(11.8,65.2) v2(11.8,64.1) v2(11.8,63) v2(12.9,65.2) v2(12.9,63) v2(14,65.2) v2(14,64.1) v2(14,63)
GND_EARTH: length 77.8
  TOP w0.508: USB1.9 USB1.8 USB1.7 USB1.6 2.1,77.4 1.56,77.94 L2.1 1.56,93.36 MH4.1 3.7,94.1 5.5,95.9 51.8,95.9 MH3.1
VCC_3V3: length 474.2
  TOP w0.203: U7.144 41.85,39.05 v1(41.8,39) ; U7.30 42.35,57.85 v1(42.3,57.9) 42.2,57.9 41.5,58.6 v1(41.5,60.5) ; TP2.1 v2(17.2,50.4) ; U5.4 13.86,40.34 13,41.2 v1(13,41.7) ; U7.121 v1(30.35,42.85) ; U7.84 v1(23.75,55.35) ; U7.39 v1(40.85,61.45) ; v1(29.3,61.4) 29.35,61.45 U7.62 ; U7.95 v1(23.85,49.85) ; U7.131 v1(35.35,42.85) ; U7.52 v1(34.35,61.45) ; U7.17 v1(42.35,51.35) ; U7.72 24.35,61.85 v1(23.95,61.45) ; U7.108 v1(23.95,43.35)
  TOP w0.508: J1.2 55.3,83.24 55.3,54 54,52.7 v1(49.8,52.7) ; B1.1 4.6,23.3 4.6,19.7 5.3,19 12.4,19 14.2,17.2 14.2,4.7 J2.1 ; v1(23.95,61.45) 24.9,60.5 29.3,60.5 ; v1(43.2,62.8) 47,66.6 v1(47,70.5) v1(47,76) 47.04,76.04 v1(47.04,80.54) v1(47.04,83.14) ; v1(12.79,54.5) 12.8,54.51 12.8,58.2 v1(14.3,59.7) 14.87,59.7 Q2.3 ; v1(29.3,61.4) 29.3,60.5 ; 29.3,60.5 34.4,60.5 ; 34.4,60.5 40,60.5 40.85,61.35 v1(40.85,61.45) ; 34.4,60.5 34.35,60.55 v1(34.35,61.45) ; v1(22.8,28) v1(12.4,28) ; v1(22.8,37.7) 22.8,42.2 v1(23.95,43.35) ; SW2.2 2.7,55.4 0.9,53.6 0.9,46.5 1.9,45.5 v1(7.7,45.5) ; v1(37.2,42.8) 35.4,42.8 v1(35.35,42.85) 34.5,43.7 31.2,43.7 v1(30.35,42.85)
  BOTTOM w0.203: C32.2 v1(42.3,57.9)
  BOTTOM w0.254: R32.1 54.2,59.7 52.9,61 52.9,67 51.8,68.1 48.34,68.1 R21.2 ; R3.2 9.24,58.44 9.9,59.1 12.2,59.1 12.8,59.7 v1(14.3,59.7)
  BOTTOM w0.508: C33.2 22.9,61.8 23.25,61.45 v1(23.95,61.45) ; R12.1 R13.1 3.06,7.2 R14.1 5,7.1 6.1,6 6.1,1.5 6.8,0.8 12.2,0.8 14.06,2.66 C20.2 J2.1 15.9,1.3 16.7,0.5 41.9,0.5 ; C38.2 35.5,42.7 v1(35.35,42.85) ; v1(23.95,43.35) 23.5,42.9 C30.2 22.66,40.96 C39.1 ; C9.1 13.3,54.5 v1(12.79,54.5) ; 40.1,42.8 v1(37.2,42.8) 37.24,42.76 37.24,32.56 39.14,30.66 L3.1 ; 40.1,42.8 40.1,46.5 42.35,48.75 v1(42.35,51.35) 43.49,51.35 C29.2 43.54,51.64 44.6,52.7 v1(49.8,52.7) ; 40.1,42.8 40.1,41.86 R20.2 40.3,41.64 C37.2 v1(41.8,39) ; J5.2 J5.1 41.9,0.5 ; R25.2 47,82.14 47,83.7 ; v1(34.35,61.45) 34.35,62.49 C31.2 ; 22.66,52 C34.2 22.71,55.35 v1(23.75,55.35) ; 22.66,52 C35.2 22.71,49.85 v1(23.85,49.85) ; 22.66,52 v2(17.2,52) ; 41.9,0.5 48.2,0.5 49.4,1.7 49.4,12.2 48.5,13.1 D8.1 ; L4.1 31.4,85.9 32.3,86.8 34.6,86.8 36.16,88.36 C23.2 C22.2 ; R23.2 v1(47.04,80.54) 41.86,80.54 38.14,84.26 C22.2 ; J3.24 38.13,90.83 38.13,88.61 C22.2 ; J1.2 J1.1 47.9,84.6 47,83.7 ; v1(30.35,42.85) 30.4,42.8 C27.2 29.96,41.66 27.5,39.2 27.5,28.51 26.99,28 v1(22.8,28) v1(22.8,37.7) ; C12.1 10.46,40.2 R15.1 R16.1 R17.1 10.44,37.06 12.4,35.1 v1(12.4,28) 9.8,25.4 B1.1 ; C12.1 v1(13,41.7) ; C12.1 10.46,43.2 R10.2 R11.2 8.5,44.7 v1(7.7,45.5) 7.7,47.3 8.4,48 14.43,48 15.9,49.47 15.9,49.6 ; 47,83.7 47.04,83.66 v1(47.04,83.14) ; R21.2 47,69.44 v1(47,70.5) ; C36.2 29.3,62.44 v1(29.3,61.4) ; v1(41.5,60.5) 40.85,61.15 v1(40.85,61.45) 40.85,62.29 C28.2 41.36,62.8 v1(43.2,62.8) 44.3,62.8 45.84,61.26 L5.2 ; v1(47,76) 47.04,76.04 R22.2
  vias: v2(17.2,51.2) v2(17.2,49.6)
VCC_5V: length 81.9
  TOP w0.254: U1.8 10.42,62.6 U1.7
  TOP w0.508: SW1.3 v1(1.85,63.35)
  TOP w1.27: SW1.3 SW1.4
  BOTTOM w0.254: R7.2 5.84,59.8 C1.1
  BOTTOM w0.508: C24.2 41.94,92.1 J3.28 38.54,95.5 7,95.5 6.1,94.6 6.1,89.5 0.6,84 0.6,64.6 v1(1.85,63.35)
  vias: v2(7.8,50.7) v2(7.8,49.9) v2(7.8,49.1) v2(8.6,50.7) v2(8.6,49.1) v2(9.2,61.8) v2(9.2,60.9) v2(10,61.8) v2(10,60.9)
VCC_5VOUT: length 31.6
  TOP w0.508: F1.1 7.61,69.4 7.1,68.89 TP1.1
  BOTTOM w0.203: R9.1 21.06,74.96 19.4,73.3 19.4,67.8 19.1,67.5 12.86,67.5 C7.1
  BOTTOM w1.27: C7.1 10.44,69.88 8.08,69.88 3.55,65.35 SW1.2
  vias: v2(8.3,71.9) v2(8.3,71) v2(9.1,71.9) v2(9.1,71)
VCC_VBAT: length 35.3
  TOP w0.203: U7.6 v1(45.65,45.85)
  BOTTOM w0.203: D7.1 45.17,45.37 v1(45.65,45.85)
  BOTTOM w0.254: D7.1 44.8,33.03 44.8,17.47 43.43,16.1 43.43,15.9 D9.2 43.4,15.73 43.4,13.17 D8.2
VCC_VDDA: length 9.1
  TOP w0.203: v1(46,59.9) 45.45,59.35 U7.33 43.15,59.35 v1(42.3,60.2)
  BOTTOM w0.203: L5.1 42.6,61.2 42.3,60.9 v1(42.3,60.2) 42.06,60.2 C26.2 ; R28.1 45.56,59.9 v1(46,59.9)
VSSA: length 5.5
  TOP w0.203: v1(42.3,58.7) 42.65,58.35 U7.31
  BOTTOM w0.203: v1(42.3,58.7) 42.06,58.7 R33.1 39.76,59.4 C26.1
BEEP: length 98.8
  TOP w0.203: U7.20 39.25,52.85 38.5,52.1 v1(38.5,47.4) ; v1(17.4,21) v1(15.3,21)
  BOTTOM w0.203: v1(38.5,47.4) 36.3,45.2 36.3,37 35.5,36.2 35.5,23.3 36.1,22.7 39.5,22.7 39.8,22.4 39.8,19.1 39.1,18.4 31.1,18.4 29.7,17 29.7,4.9 29.2,4.4 18,4.4 17.4,5 v1(17.4,21) ; v1(15.3,21) R18.1
BOOT0: length 124.7
  TOP w0.203: U7.138 38.85,43.85 36.3,46.4 36.3,55.9 35.3,56.9 v1(25.1,56.9)
  BOTTOM w0.203: R30.1 41.5,8.2 39.5,6.2 39.5,2.1 38.5,1.1 17.7,1.1 16.9,1.9 16.9,32.6 25.1,40.8 v1(25.1,56.9) 16.96,56.9 R6.1
BOOT1: length 101.7
  TOP w0.203: J3.29 44.9,89.14 v1(44.9,69.1) 42.1,66.3 38.3,66.3 36.35,64.35 U7.48
  BOTTOM w0.203: v1(44.9,69.1) 49.4,64.6 49.4,56.1 50.7,54.8 50.7,52.5 44.4,46.2 44.4,18.5 42.6,16.7 42.6,10.2 44.6,8.2 R31.2
DCMI_D0: length 48.9
  TOP w0.203: U7.96 v1(26.1,49.35) ; v1(23.52,29.2) J2.8
  BOTTOM w0.203: v1(23.52,29.2) 23.52,36.52 26.1,39.1 v1(26.1,49.35)
DCMI_D1: length 71.8
  TOP w0.203: J2.9 24.8,4.26 24.8,6.1 26.7,8 26.7,27 23.9,29.8 12.2,29.8 9.7,32.3 9.7,46 12.55,48.85 U7.97
DCMI_D5: length 46.5
  TOP w0.203: v1(38.3,10.9) 38.3,4.5 37.8,4 32.14,4 J2.13 ; U7.136 v1(37.85,36.3)
  BOTTOM w0.203: v1(37.85,36.3) 37.85,33.05 40.58,30.32 40.58,13.18 v1(38.3,10.9)
DCMI_D6: length 59.8
  TOP w0.203: U7.4 v1(42.05,44.85)
  BOTTOM w0.203: J2.14 31.14,4.54 30.1,3.5 30.1,2.4 31,1.5 38.2,1.5 39.03,2.33 39.03,7.64 41.8,10.41 41.8,37.7 43,38.9 43,42.6 42.05,43.55 v1(42.05,44.85)
DCMI_D7: length 53.3
  TOP w0.203: U7.5 v1(41.45,45.35)
  BOTTOM w0.203: 41.4,45.4 v1(41.45,45.35) 41.45,43.55 42.6,42.4 42.6,39 41.4,37.8 41.4,10.44 38.73,7.77 38.73,2.63 38,1.9 34.8,1.9 33.7,3 J2.15
DCMI_HREF: length 81.9
  TOP w0.203: U7.40 40.35,61.85 v1(39.9,61.4)
  BOTTOM w0.203: J2.5 20.98,3.08 21.9,4 29.5,4 30.1,4.6 30.1,9.31 30.1,9.32 30.1,16.5 31.4,17.8 39.3,17.8 40.1,18.6 40.1,28.1 39.6,28.6 38.4,28.6 38.1,28.9 38.1,30.4 36.7,31.8 36.7,44.5 38.96,46.76 38.96,47.21 38.96,47.21 38.96,47.59 38.96,47.59 38.96,60.46 v1(39.9,61.4) 39.9,62.14 R29.2
DCMI_PCLK: length 65.8
  TOP w0.203: U7.42 39.35,61.55 v1(39.2,61.4) ; J2.16 33.68,5.52 34.7,4.5 37.1,4.5 37.6,5 37.6,11 34.7,13.9 v1(34.7,37.5)
  BOTTOM w0.203: v1(39.2,61.4) 38.5,60.7 38.5,48.3 34.7,44.5 v1(34.7,37.5)
DCMI_PWDN: length 37.4
  TOP w0.203: U7.124 31.85,10.05 36.22,5.68 J2.18
DCMI_RESET: length 55.5
  TOP w0.203: U7.132 35.85,14.25 38.8,11.3 38.8,3.6 36.7,1.5 25,1.5 23.52,2.98 J2.7
DCMI_SCL: length 44.5
  TOP w0.203: U7.122 30.85,39.65 v1(28.8,37.6)
  BOTTOM w0.203: J2.4 21.5,8.6 28,8.6 28.8,9.4 v1(28.8,37.6)
DCMI_SDA: length 42.8
  TOP w0.203: U7.123 31.35,39.15 v1(29.3,37.1)
  BOTTOM w0.203: J2.6 20.98,5.6 23.3,7.92 28.28,7.92 29.3,8.94 v1(29.3,37.1)
DCMI_VSYNC: length 62.9
  TOP w0.203: v1(39.3,10.9) 39.3,2 38.4,1.1 20.3,1.1 18.44,2.96 J2.3 ; U7.137 v1(38.35,35.84)
  BOTTOM w0.203: v1(39.3,10.9) 41,12.6 41,30.5 38.35,33.15 v1(38.35,35.84)
DCMI_XCLK: length 58.1
  TOP w0.203: J2.17 35.12,1.9 30.7,1.9 30.1,2.5 30.1,26.7 v1(26.6,30.2) ; U7.100 23.25,47.35 23.6,47.7 v1(26.6,47.7)
  BOTTOM w0.203: v1(26.6,47.7) v1(26.6,30.2)
DTR: length 17.9
  TOP w0.254: U1.28 11.41,66.89 11.23,67.07 v1(9.47,67.07)
  BOTTOM w0.254: v1(9.47,67.07) 9.47,63.73 12.3,60.9 12.3,59.9 12,59.6 8.9,59.6 8.1,58.8 8.1,57.84 R4.1
FSMC_A0: length 48.1
  TOP w0.203: U8.5 v1(38,80) ; U7.10 v1(39.41,47.85)
  BOTTOM w0.203: v1(38,80) 38,70.97 47.01,61.95 47.01,58.61 45.49,57.09 41.19,57.09 39.41,55.31 v1(39.41,47.85)
FSMC_A1: length 46.9
  TOP w0.203: U8.4 v1(38.8,80) ; U7.11 v1(39.87,48.35)
  BOTTOM w0.203: v1(38.8,80) 38.8,70.81 47.4,62.21 47.4,58.5 45.6,56.7 41.4,56.7 39.87,55.17 v1(39.87,48.35)
FSMC_A2: length 45.7
  TOP w0.203: U7.12 v1(40.33,48.85) ; U8.3 v1(39.6,80)
  BOTTOM w0.203: v1(39.6,80) 39.6,70.66 47.8,62.46 47.8,58.4 45.7,56.3 41.6,56.3 40.33,55.03 v1(40.33,48.85)
FSMC_A3: length 44.5
  TOP w0.203: U7.13 v1(40.79,49.35) ; U8.2 v1(40.4,80)
  BOTTOM w0.203: v1(40.4,80) 40.4,70.51 48.2,62.71 48.2,58.3 45.8,55.9 41.8,55.9 40.79,54.89 v1(40.79,49.35)
FSMC_A4: length 43.4
  TOP w0.203: U7.14 v1(41.24,49.85) ; U8.1 v1(41.2,80)
  BOTTOM w0.203: v1(41.2,80) 41,79.8 41,70.55 48.6,62.95 48.6,58.2 45.9,55.5 42,55.5 41.24,54.74 v1(41.24,49.85)
FSMC_A5: length 31.9
  TOP w0.203: U8.44 41.25,70.6 v1(42.3,70.6) ; U7.15 v1(41.7,50.35)
  BOTTOM w0.203: v1(41.7,50.35) 41.7,54.7 42.1,55.1 46,55.1 49,58.1 49,63.9 v1(42.3,70.6)
FSMC_A6: length 70.2
  TOP w0.203: U7.50 35.35,64.45 38.1,67.2 39.1,67.2 40.4,68.5 U8.43 40.4,71.4 44.1,75.1 44.1,86.1 40.8,89.4 35.2,89.4 34.3,90.3 34.3,94.1 33.4,95 9.28,95 7.65,93.37
FSMC_A7: length 10.9
  TOP w0.203: U7.53 33.85,64.3 34.05,64.5 34.8,64.5 37.9,67.6 39,67.6 39.6,68.2 U8.42
FSMC_A8: length 12.2
  TOP w0.203: U7.54 33.35,67.35 32,68.7 28,68.7 27.6,69.1 U8.27
FSMC_A9: length 12.5
  TOP w0.203: U7.55 32.85,67.25 31.8,68.3 27.4,68.3 26.8,68.9 U8.26
FSMC_A10: length 12.8
  TOP w0.203: U7.56 32.35,67.25 31.7,67.9 27.1,67.9 26,69 U8.25
FSMC_A11: length 12.9
  TOP w0.203: U8.24 25.2,69.2 26.9,67.5 31.5,67.5 31.85,67.15 U7.57
FSMC_A12: length 33.1
  TOP w0.203: U8.22 23.05,81.85 20.6,79.4 20.6,62.8 19.6,61.8 19.6,54.2 19.95,53.85 U7.87
FSMC_A13: length 37.1
  TOP w0.203: U8.21 25.2,82.6 24.7,83.1 22.9,83.1 20.2,80.4 20.2,62.9 19.2,61.9 19.2,54 19.85,53.35 U7.88
FSMC_A14: length 39.4
  TOP w0.203: U7.89 19.75,52.85 18.8,53.8 18.8,62.1 19.8,63.1 19.8,80.6 22.7,83.5 25.1,83.5 26,82.6 U8.20
FSMC_A15: length 41.8
  TOP w0.203: U7.90 19.65,52.35 18.4,53.6 18.4,62.2 19.4,63.2 19.4,80.8 22.5,83.9 25.5,83.9 26.8,82.6 U8.19
FSMC_A16: length 30.3
  TOP w0.203: U8.18 27.6,81 26.9,80.3 23.9,80.3 21.6,78 21.6,62.2 20.7,61.3 20.7,57.7 21.05,57.35 U7.80
FSMC_A17: length 18.9
  TOP w0.203: v1(21.1,69.2) 21.1,62.5 20.2,61.6 20.2,57.4 20.75,56.85 U7.81 ; v1(24.4,69.24) U8.23
  BOTTOM w0.203: v1(24.4,69.24) 21.14,69.24 v1(21.1,69.2)
FSMC_A18: length 20.6
  TOP w0.203: v1(28.4,69.2) U8.28 ; U7.82 v1(28.5,56.35)
  BOTTOM w0.203: v1(28.5,56.35) 28.4,56.45 v1(28.4,69.2)
FSMC_D0: length 70.6
  TOP w0.203: v1(33.2,54.81) 33.19,54.81 33.15,54.85 U7.85 ; 12.73,93.37 14,92.1 16,92.1 16.5,91.6 16.5,89.3 17.2,88.6 31.9,88.6 36.4,84.1 U8.7 v1(36.4,80)
  BOTTOM w0.203: v1(33.2,54.81) 33.2,63.7 33.2,63.71 33.2,65.5 36.4,68.7 v1(36.4,80)
FSMC_D1: length 65.7
  TOP w0.203: 15.27,90.83 15.27,89.33 16.4,88.2 31.5,88.2 35.6,84.1 U8.8 v1(35.6,80) ; U7.86 v1(32.8,54.35)
  BOTTOM w0.203: v1(32.8,54.35) 32.7,54.45 32.7,65.6 35.6,68.5 v1(35.6,80)
FSMC_D2: length 80.5
  TOP w0.203: v1(31.8,53.8) 28.5,50.5 28.5,45.3 26.85,43.65 U7.114 ; v1(34.2,80) 34.8,80.6 U8.9 34.8,84.1 31.1,87.8 15.5,87.8 14,89.3 14,91.4 13.3,92.1 11.9,92.1 11.45,92.55 11.45,94.15 11.9,94.6 14.04,94.6 15.27,93.37
  BOTTOM w0.203: v1(31.8,53.8) 31.9,53.9 31.9,66 34.2,68.3 v1(34.2,80)
FSMC_D3: length 74.5
  TOP w0.203: v1(17.81,87.3) 29.4,87.3 34,82.7 U8.10 ; U7.115 v1(27.35,42.8)
  BOTTOM w0.203: v1(27.35,42.8) 27.2,42.95 27.2,56.7 20.6,63.3 20.6,71.8 22.9,74.1 22.9,82.21 v1(17.81,87.3) J3.9
FSMC_D4: length 42.9
  TOP w0.203: v1(31.6,80) U8.13 31.6,84.5 29.3,86.8 v1(19.11,86.8) ; U7.58 31.35,66.05 v1(30.4,67)
  BOTTOM w0.203: v1(19.11,86.8) 19.11,92.07 J3.10 ; v1(31.6,80) 30.3,78.7 30.3,67.1 v1(30.4,67)
FSMC_D5: length 37.7
  TOP w0.203: v1(20.41,86.3) 28.6,86.3 30.8,84.1 U8.14 30.85,81.8 v1(30.85,80) ; U7.59 30.85,65.35 v1(30,66.2)
  BOTTOM w0.203: v1(20.41,86.3) 20.41,90.77 20.35,90.83 ; v1(30,66.2) 29.9,66.3 29.9,79.05 v1(30.85,80)
FSMC_D6: length 38.6
  TOP w0.203: v1(30,80) U8.15 30,83.7 27.9,85.8 v1(21.61,85.8) ; U7.60 30.35,65.05 29.4,66 v1(29.4,66.7)
  BOTTOM w0.203: v1(30,80) 29.4,79.4 v1(29.4,66.7) ; 20.35,93.37 21.61,92.11 v1(21.61,85.8)
FSMC_D7: length 33.1
  TOP w0.203: v1(22.91,85.3) 27.3,85.3 29.2,83.4 U8.16 v1(29.2,80) ; v1(28.9,66.2) 28.85,66.15 U7.63
  BOTTOM w0.203: v1(29.2,80) 28.85,79.65 28.85,69.4 28.86,69.39 28.86,68.81 28.85,68.8 28.85,66.25 v1(28.9,66.2) ; v1(22.91,85.3) 22.91,90.81 J3.13
FSMC_D8: length 40.1
  TOP w0.203: U8.29 29.2,72.3 28.5,73 v1(24.2,73) 23.6,72.4 23.6,69.2 28.35,64.45 U7.64
  BOTTOM w0.203: v1(24.2,73) 24.2,92.06 J3.14
FSMC_D9: length 38.4
  TOP w0.203: U7.65 27.85,64.35 23.2,69 23.2,72.9 23.9,73.6 v1(25.5,73.6) 28.7,73.6 30,72.3 U8.30
  BOTTOM w0.203: J3.15 25.5,90.76 v1(25.5,73.6)
FSMC_D10: length 42.7
  TOP w0.203: U7.66 27.35,64.25 22.8,68.8 22.8,73.3 23.8,74.3 v1(26.7,74.3) 28.8,74.3 30.8,72.3 U8.31
  BOTTOM w0.203: J3.16 26.7,92.1 v1(26.7,74.3)
FSMC_D11: length 41.2
  TOP w0.203: U7.67 26.85,64.15 22.4,68.6 22.4,73.7 23.6,74.9 v1(27.3,74.9) 29,74.9 31.6,72.3 U8.32
  BOTTOM w0.203: v1(27.3,74.9) 27.3,90.17 J3.17
FSMC_D12: length 47.2
  TOP w0.203: U7.68 26.35,64.05 22,68.4 22,73.9 23.6,75.5 v1(28.3,75.5) 30.9,75.5 34,72.4 U8.35
  BOTTOM w0.203: v1(28.3,75.5) 28.3,89 29.3,90 29.3,92.04 J3.18
FSMC_D13: length 58.5
  TOP w0.203: 30.51,90.83 33.74,87.6 40,87.6 42.5,85.1 42.5,76.7 39,73.2 36.6,73.2 34.8,71.4 U8.36 34.8,65.9 v1(35,65.7) ; U7.77 v1(35.2,58.85)
  BOTTOM w0.203: v1(35,65.7) 35,65.1 35.2,64.9 v1(35.2,58.85)
FSMC_D14: length 61.8
  TOP w0.203: 30.51,93.37 31.8,92.08 31.8,90.1 33.9,88 40.2,88 42.9,85.3 42.9,76.54 39.16,72.8 37,72.8 35.6,71.4 U8.37 v1(35.6,66) ; U7.78 v1(35.7,58.35)
  BOTTOM w0.203: v1(35.7,58.35) 35.7,65.9 v1(35.6,66)
FSMC_D15: length 59.1
  TOP w0.203: v1(36.2,66.6) 36.4,66.8 U8.38 36.4,71.4 37.4,72.4 39.3,72.4 43.3,76.4 43.3,85.46 40.36,88.4 34.1,88.4 33.05,89.45 J3.21 ; v1(36.21,57.85) 25.8,57.85 25.79,57.86 25.41,57.86 25.4,57.85 U7.79
  BOTTOM w0.203: v1(36.21,57.85) 36.21,66.59 v1(36.2,66.6)
FSMC_NBL0: length 31.2
  TOP w0.203: v1(36.7,56.8) 36.7,46.5 40.35,42.85 U7.141 ; U8.39 37.2,67.7 v1(36.9,67.4)
  BOTTOM w0.203: v1(36.7,56.8) 36.7,67.2 v1(36.9,67.4)
FSMC_NBL1: length 31.3
  TOP w0.203: U8.40 v1(38,68.1) ; v1(37.2,56.4) 37.2,46.6 40.85,42.95 U7.142
  BOTTOM w0.203: v1(37.2,56.4) 37.2,66.9 38,67.7 v1(38,68.1)
FSMC_NE3: length 46.2
  TOP w0.203: U7.125 32.35,42.75 v1(32.3,42.8) ; U8.6 v1(37.2,80)
  BOTTOM w0.203: v1(37.2,80) R27.2 35.94,81.34 35,80.4 35,68.5 32.3,65.8 v1(32.3,42.8)
FSMC_NE4: length 105.9
  TOP w0.203: U7.127 v1(33.35,39.2) ; v1(30.75,34.65) v1(11.7,34.65)
  BOTTOM w0.203: 7.65,90.83 7.67,90.83 10.8,87.7 15.3,87.7 22.1,80.9 22.1,74.5 19.8,72.2 19.8,64 14.5,58.7 14.5,55.5 14.2,55.2 7.8,55.2 6.9,54.3 6.9,37 9.25,34.65 v1(11.7,34.65) ; v1(33.35,39.2) 31.5,39.2 30.75,38.45 v1(30.75,34.65)
FSMC_NOE: length 92.7
  TOP w0.203: v1(34.7,54.8) 28.85,48.95 U7.118 ; v1(34.3,89.6) 35.1,88.8 40.7,88.8 43.7,85.8 43.7,76.3 38.8,71.4 U8.41 v1(38.8,68.1)
  BOTTOM w0.203: 10.19,93.37 11.52,94.7 33.6,94.7 34.3,94 v1(34.3,89.6) ; v1(38.8,68.1) 38.8,67.9 37.7,66.8 37.7,55.2 37.3,54.8 v1(34.7,54.8)
FSMC_NWE: length 64.4
  TOP w0.203: 10.19,90.83 11.82,89.2 13.2,89.2 17.7,84.7 26.9,84.7 28.4,83.2 U8.17 28.4,80.6 v1(27.8,80) ; v1(29.35,42.9) U7.119
  BOTTOM w0.203: v1(29.35,42.9) 29.35,42.95 27.8,44.5 v1(27.8,80)
IIC_SCL: length 20.9
  TOP w0.203: U7.139 39.35,37.85 40.6,36.6 44.1,36.6 45.2,35.5 45.2,32 46.4,30.8 49.3,30.8 49.5,31 49.5,32 48.84,32.66 U6.6
IIC_SDA: length 16.2
  TOP w0.203: U6.5 46.52,31.39 45.7,32.21 45.7,35.51 44.21,37 40.91,37 39.85,38.06 U7.140
JTAG_TCLK: length 59.6
  TOP w0.203: v1(33.2,77.5) v1(41.7,77.5) ; U7.109 24.35,42.55 27.7,45.9 27.7,51.2 v1(30.3,53.8)
  BOTTOM w0.203: v1(30.3,53.8) 31.1,54.6 31.1,66.4 33.2,68.5 v1(33.2,77.5) ; v1(41.7,77.5) 41.9,77.5 44,75.4 47.7,75.4 48.56,74.54 R26.2 51.34,74.5 J1.9
JTAG_TDI: length 60.2
  TOP w0.203: U7.110 24.85,42.35 28.1,45.6 28.1,50.81 v1(31.1,53.8) ; v1(33.2,78.8) v1(41.7,78.8)
  BOTTOM w0.203: v1(33.2,78.8) 33.25,78.8 33.7,78.35 33.7,68.4 31.5,66.2 31.5,54.21 v1(31.1,53.8) ; J1.5 51.32,79.6 R23.1 48.56,79.56 47.8,78.8 v1(41.7,78.8)
JTAG_TMS: length 58.9
  TOP w0.203: v1(41.7,78.16) v1(33.2,78.16) ; U7.105 25.95,44.85 27.3,46.2 27.3,51.6 v1(29.5,53.8)
  BOTTOM w0.203: v1(33.2,78.16) 33.06,78.16 32.6,77.7 32.6,68.5 30.7,66.6 30.7,55 v1(29.5,53.8) ; v1(41.7,78.16) 47.34,78.16 48.5,77 R22.1 51.38,77 J1.7
KEY0: length 11.1
  TOP w0.203: U7.3 45.05,44.35 46.4,43 50.5,43 SW3.3
KEY1: length 17.6
  TOP w0.203: U7.2 45.05,43.85 46.3,42.6 53.9,42.6 54.7,41.8 54.7,37.5 SW4.3
KEY2: length 25
  TOP w0.203: SW5.3 54.6,27.7 54.6,32.9 52.2,35.3 52.2,40.9 50.9,42.2 46.1,42.2 44.95,43.35 U7.1
LCD_BL: length 74.7
  TOP w0.203: U7.76 39.65,59.35 42.6,62.3 43.6,62.3 50.1,68.8 50.1,93.9 49.3,94.7 37.4,94.7 36.9,94.2 36.9,92.14 J3.23
LED0: length 107
  TOP w0.203: D4.2 8.8,11.9 11.8,8.9 11.8,1.6 12.7,0.7 38.7,0.7 39.9,1.9 39.9,15.9 42.6,18.6 v1(43.19,18.6) ; v1(43.2,37.6) 43.2,41.7 38,46.9 38,52.69 38.66,53.35 U7.21
  BOTTOM w0.203: v1(43.19,18.6) 43.19,37.59 v1(43.2,37.6)
LED1: length 107.7
  TOP w0.203: U7.22 38.45,53.85 37.6,53 37.6,46.8 42.5,41.9 v1(42.5,37.6) ; D5.2 4.22,10.8 9.33,10.8 11.4,8.73 11.4,1.43 12.53,0.3 39,0.3 40.3,1.6 40.3,15.1 42.5,17.3 v1(42.5,17.4)
  BOTTOM w0.203: v1(42.5,37.6) v1(42.5,17.4)
NRST: length 90.5
  TOP w0.203: 42.3,55.35 v1(42.3,54.5) ; 42.3,55.35 40.35,57.3 25.7,57.3 v1(25.6,57.4) ; 42.3,55.35 U7.25 ; SW6.3 52.3,54.5 v1(50.1,54.5)
  BOTTOM w0.203: v1(25.6,57.4) 21.3,57.4 20.2,58.5 ; SW6.3 53.4,57.54 C25.2 R32.2 52.5,59.94 52.5,65.72 J1.15 ; v1(42.3,54.5) v1(50.1,54.5) ; 20.2,58.5 D10.1 ; 20.2,58.5 20.2,72 22.5,74.3 22.5,81.1 12.77,90.83 12.73,90.83
PA5: length 2.9
  TOP w0.203: U7.41 v1(39.85,64.95)
  BOTTOM w0.203: R29.1 39.85,64.21 v1(39.85,64.95)
PA9: length 60.1
  TOP w0.203: U7.101 23.55,46.85 23.56,46.84 23.7,46.98 v1(24.1,46.98)
  BOTTOM w0.203: v1(24.1,46.98) 23.7,46.98 23.52,46.81 17.73,46.81 16.1,45.17 16.1,20.17 11.19,15.27 11.19,2.1 10.99,1.9 9.18,1.9 8.97,2.1 8.97,2.8 9.18,3 J4.3
PA10: length 60.8
  TOP w0.203: v1(24.1,46.22) 23.7,46.22 23.57,46.35 U7.102
  BOTTOM w0.203: v1(24.1,46.22) 23.7,46.22 23.52,46.4 17.9,46.4 16.51,45.01 16.51,20.01 11.6,15.1 11.6,1.93 11.16,1.49 9.01,1.49 8.57,1.93 8.57,2.8 8.36,3 J4.1
PB0: length 37.1
  TOP w0.203: J3.34 47,92.08 47,90 46.15,89.15 46.15,68.95 42.7,65.5 38.7,65.5 37.35,64.15 U7.46
PB1: length 33.8
  TOP w0.203: U7.47 36.85,64.25 38.5,65.9 42.53,65.9 45.75,69.12 J3.31
PC13: length 73.2
  TOP w0.203: v1(46.4,45.9) 45.95,46.35 U7.7
  BOTTOM w0.203: J3.33 45.9,88.44 45.9,81.6 46.5,81 51.6,81 52.8,79.8 52.8,73.8 52.2,73.2 47,73.2 45.9,72.1 45.9,68.9 49.5,65.3 49.7,65.3 49.9,65.1 49.9,59.8 52.2,57.5 52.2,44.1 51.25,43.15 47.05,43.15 46.4,43.8 v1(46.4,45.9)
PC14: length 7
  TOP w0.203: C15.2 48.46,45.19 X2.2 48.2,46.4 47.75,46.85 U7.8
PC15: length 6.1
  TOP w0.203: U7.9 47.15,47.35 47.75,47.95 X2.1 48.46,48.21 C16.2
PF11: length 37.5
  TOP w0.203: J3.30 41.9,92.06 41.9,89.8 44.5,87.2 44.5,69.7 41.5,66.7 38.1,66.7 35.85,64.45 U7.49
RTS: length 19.3
  TOP w0.203: U1.24 13.41,67.21 13.7,67.5 16,67.5 16.4,67.1 16.4,61.9 14.9,60.4 13.4,60.4 12.3,59.3 12.3,57.4 11.72,56.82 Q1.2
  TOP w0.254: Q1.2 v1(11.72,55.72)
  BOTTOM w0.254: v1(11.72,55.72) 11.72,56.18 R5.1
RXD: length 80.1
  TOP w0.203: v1(5.54,20.88) 5.95,20.88 6.12,20.7 7.7,20.7 8.19,21.19 8.19,45.69 12.7,50.2 12.7,53.4 15,55.7 15,57.5 16.9,59.4 16.9,67.49 16.4,67.99 13.07,67.99 12.87,67.79 12.87,67.46 12.91,67.42 U1.25
  BOTTOM w0.203: R1.1 3.54,21.46 3.75,21.26 3.75,20.89 3.96,20.69 4.24,20.69 4.25,20.7 4.96,20.7 5.14,20.88 v1(5.54,20.88) 5.72,20.71 7.19,20.71 8.97,18.93 8.97,5.74 9.18,5.54 J4.4
SDIO_CLK: length 22
  TOP w0.203: v1(15.5,35.84) 24.64,35.84 26.35,37.55 U7.113 ; v1(15.5,41.5) 15.44,41.44 U5.5
  BOTTOM w0.203: v1(15.5,41.5) v1(15.5,35.84)
SDIO_CMD: length 26.4
  TOP w0.203: U5.3 v1(13.1,39.24) 13.04,39.24 12.1,38.3 12.1,36.3 13.1,35.3 24.9,35.3 27.85,38.25 U7.116
  BOTTOM w0.203: v1(13.1,39.24) 12.92,39.24 R15.2
SDIO_D0: length 69.2
  TOP w0.203: v1(13,43.64) 12.5,44.14 12.5,45.8 13.2,46.5 16.8,46.5 18.65,48.35 U7.98 ; v1(13,43.64) 10.1,40.74 10.1,32.6 12.4,30.3 24,30.3 27.2,27.1 27.2,6.68 J2.10 ; v1(13,43.64) U5.7
  BOTTOM w0.203: R10.1 12.4,43.64 v1(13,43.64)
SDIO_D1: length 68.8
  TOP w0.203: J2.11 27.6,4 27.6,27.4 23.75,31.25 12.09,31.25 11.05,32.29 11.05,38.35 v1(13,40.3) ; v1(13.04,44.74) U5.8 15.74,44.74 18.85,47.85 U7.99
  BOTTOM w0.203: v1(13,40.3) 13.9,41.2 13.9,43.88 v1(13.04,44.74) 12,44.74 R11.1
SDIO_D2: length 16.7
  TOP w0.203: v1(13.1,37.04) U5.1 24.04,37.04 25.35,38.35 U7.111
  BOTTOM w0.203: v1(13.1,37.04) 12.12,37.04 R17.2
SDIO_D3: length 55.2
  TOP w0.203: v1(25.8,30.2) 28,28 28,6.14 J2.12 ; U7.112 25.85,37.95 v1(25.8,37.9) 24.2,36.3 12.8,36.3 12.5,36.6 12.5,37.6 13.04,38.14 v1(13.1,38.14) U5.2
  BOTTOM w0.203: v1(25.8,30.2) v1(25.8,37.9) ; R16.2 12.52,38.14 v1(13.1,38.14)
TXD: length 81.5
  TOP w0.203: v1(5.54,20.12) 5.95,20.12 6.12,20.29 7.87,20.29 8.6,21.03 8.6,45.53 13.11,50.03 13.11,53.23 15.41,55.53 15.41,57.33 17.31,59.23 17.31,67.66 16.57,68.4 12.9,68.4 12.46,67.96 12.46,67.46 12.41,67.42 U1.26
  BOTTOM w0.203: J4.2 8.36,5.54 8.57,5.74 8.57,18.76 7.03,20.3 5.73,20.3 v1(5.54,20.12) 5.14,20.12 4.96,20.29 4.42,20.29 4.41,20.29 4.25,20.29 3.96,20.28 3.76,20.08 3.76,19.71 3.56,19.51 R2.1
VREF+: length 3.3
  TOP w0.203: U7.32 42.85,58.85 v1(42.3,59.4)
  BOTTOM w0.203: v1(42.3,59.4) R28.2
W25QXX_CS: length 56.9
  TOP w0.203: U4.7 38.62,21.32 v1(39.3,22) ; v1(34.2,59.85) U7.75
  BOTTOM w0.203: v1(34.2,59.85) 34.2,22.7 35.58,21.32 38.62,21.32 v1(39.3,22)
W25QXX_SPI_CLK: length 75.7
  TOP w0.203: U7.133 36.35,30.15 36.9,29.6 39.1,29.6 39.76,28.95 v1(45.66,28.95) U4.16
  BOTTOM w0.203: R21.1 51.36,69.4 J1.13 52.66,68.1 54.2,68.1 55.1,67.2 55.1,34.6 54.1,33.6 50.9,33.6 49.4,32.1 46.3,32.1 45.66,31.45 v1(45.66,28.95)
W25QXX_SPI_MISO: length 109.4
  TOP w0.203: U7.134 36.85,30.45 37.3,30 39.3,30 39.7,29.6 48.4,29.6 48.8,29.2 48.8,28.6 48.5,28.3 v1(45.7,28.3) 45.4,28 45.4,21 44.45,20.05 U4.8
  BOTTOM w0.203: v1(45.7,28.3) 45.9,28.3 46.2,28.6 46.2,31.2 46.7,31.7 49.6,31.7 51.1,33.2 54.3,33.2 55.5,34.4 55.5,79.8 54.5,80.8 52.66,80.8 J1.3 51.36,82.1 R25.1
W25QXX_SPI_MOSI: length 26.2
  TOP w0.203: U7.135 37.3,41.05 37.3,30.8 37.7,30.4 39.6,30.4 40,30 48.8,30 49.2,29.6 49.2,28.2 48.67,27.68 U4.15
WK_UP: length 70.4
  TOP w0.203: U7.34 45.15,59.85 45.5,60.2 v1(45.5,62.7) ; SW2.3 2.7,49.8 5.2,47.3 v1(8.9,47.3) ; v1(33.7,55.5) v1(24.5,55.5)
  BOTTOM w0.203: v1(45.5,62.7) 45.5,62.8 39.7,68.6 36.9,68.6 33.6,65.3 33.6,55.9 33.7,55.8 v1(33.7,55.5) ; v1(24.5,55.5) 24.5,48.5 23.3,47.3 v1(8.9,47.3)
N10964059: length 6.2
  TOP w0.203: U6.2 41.83,33.93 41.6,33.7 41.6,32.8 40.75,31.95 X1.1 40.01,32.34 C13.2
N11517045: length 6.2
  TOP w0.203: U7.23 46.25,54.35 47.3,53.3 X3.2 48.46,52.44 C40.2
N11517097: length 7.7
  TOP w0.203: C41.2 48.36,57.86 X3.1 47.6,55.4 47.05,54.85 U7.24
N11518043: length 5.2
  TOP w0.203: v1(40.4,39) 41.35,39.95 U7.143
  BOTTOM w0.203: R24.1 R20.1 40.4,40.04 v1(40.4,39)
N11518115: length 3.4
  TOP w0.203: U7.106 v1(23.95,44.35)
  BOTTOM w0.203: C19.1 22.79,44.35 v1(23.95,44.35)
N11524608: length 21.7
  TOP w0.203: U8.33 32.4,72.2 v1(31.8,72.8) ; U8.11 v1(33.2,80)
  BOTTOM w0.254: C17.2 v1(33.2,80) 31.8,78.6 v1(31.8,72.8) C18.1 ; C17.2 34.72,82.86 R27.1 ; C17.2 31.68,81.34 L4.2
N11556832: length 2.8
  TOP w0.203: U6.1 41.6,35.2 40.85,34.45 X1.2
N11557131: length 5.6
  TOP w0.203: U6.8 v1(46.2,35.2)
  BOTTOM w0.203: v1(46.2,35.2) C14.1 47.44,35.06 48.63,33.87 48.63,33.4
N11560624: length 2.7
  TOP w0.203: v1(1.5,13.2) 1.5,12.12 D4.1
  BOTTOM w0.203: v1(1.5,13.2) 1.54,13.16 R12.2
N11560628: length 2.6
  TOP w0.203: D5.1 1.54,9.65 v1(1.54,8.64)
  BOTTOM w0.203: R13.2 v1(1.54,8.64)
N11560632: length 2.6
  TOP w0.203: D6.1 1.28,7.02 1.43,6.87 v1(1.43,5.83)
  BOTTOM w0.203: v1(1.43,5.83) 1.43,7.09 R14.2
N11623966: length 3.1
  TOP w0.203: U7.71 v1(24.85,61.45)
  BOTTOM w0.203: v1(24.85,61.45) 24.85,62.51 C21.1
N11629153: length 7.5
  BOTTOM w0.508: 13.12,83.9 DC1.1 ; DC1.1 15.88,83.9 ; DC1.1 14.5,86.28 ; DC1.1 14.5,81.52
  vias: v2(14,75.3) v2(14,74.3)
N11629321:
  vias: v2(15.9,72.7) v2(15.9,71.8) v2(15.9,70.9) v2(15.9,69.9)
N11629345: length 3.5
  TOP w0.203: U2.3 v1(18.35,76.55)
  BOTTOM w0.203: v1(18.35,76.55) 19.48,76.55 R8.1 R9.2
N11637754: length 17.6
  TOP w0.203: v1(7.8,65.3) 8,65.1 8.52,65.1 8.52,65.1 8.6,65.1 9.7,64 10.3,64 U1.4 ; USB1.3 5.81,73.61 6,73.8 6.9,73.8 7,73.7 7,72.5 5.7,71.2 5.7,65.5 5.49,65.3 5.2,65.3 5.2,65.3 v1(5.1,65.3)
  BOTTOM w0.203: v1(5.1,65.3) 5.3,65.1 7.6,65.1 v1(7.8,65.3)
N11637758: length 18.7
  TOP w0.203: v1(7.8,64.67) 7.93,64.8 8.4,64.8 9.6,63.6 U1.5 ; USB1.2 5.84,74.26 6,74.1 7.1,74.1 7.3,73.9 7.3,72.37 6.1,71.17 6.1,65.4 5.5,64.8 5.24,64.8 v1(5.1,64.67)
  BOTTOM w0.203: v1(7.8,64.67) 7.67,64.8 5.23,64.8 v1(5.1,64.67)
N11638713: length 2.9
  TOP w0.254: v1(9,63.4) 9.3,63.1 U1.6
  BOTTOM w0.254: v1(9,63.4) 7.74,63.4 C2.1
N11638764: length 6
  TOP w0.254: v1(11.7,60.2) 11.91,60.41 U1.9
  BOTTOM w0.254: v1(11.7,60.2) 11.6,60.1 7.66,60.1 R7.1
N11638791: length 2.7
  TOP w0.203: D1.1 v1(1.18,22.8)
  BOTTOM w0.203: R1.2 1.18,21.68 v1(1.18,22.8)
N11764026: length 25.2
  TOP w0.203: U4.9 46.55,20.05 45.8,19.3 36.9,19.3 36.4,19.8 v1(36.4,27.7) 37.1,27.7 37.12,27.68 U4.2 U4.1
  BOTTOM w0.203: v1(36.4,27.7) C11.1 37.3,27.74 37.3,29.2 37.06,29.44 L3.2
N11774127: length 2.7
  TOP w0.203: D2.1 v1(1.18,18.22)
  BOTTOM w0.203: R2.2 1.18,19.25 v1(1.18,18.22)
N11779339: length 3.7
  BOTTOM w0.203: R19.2 R18.2 12.57,20.73 Q3.1
N11779536: length 4.4
  BOTTOM w0.203: B1.2 11.07,23.27 Q3.3
N11799005: length 3
  TOP w0.254: Q1.1 10.55,56.75 10.8,56.5 v1(10.8,55.7)
  BOTTOM w0.254: R4.2 10.76,55.74 v1(10.8,55.7)
N11799595: length 2.2
  TOP w0.254: Q2.1 14.28,56.58 13.76,56.06 v1(13.76,55.7)
  BOTTOM w0.254: v1(13.76,55.7) R5.2
N11799717: length 2.2
  TOP w0.254: Q2.2 16.12,56.53 v1(16.12,55.82)
  BOTTOM w0.254: v1(16.12,55.82) R6.2
N11824757: length 4.4
  TOP w0.254: Q1.3 10.71,58.55 10.96,58.3 v1(11.7,58.3)
  BOTTOM w0.254: R3.1 v1(11.7,58.3) 13.07,58.3 13.27,58.5
N115355290: length 3.3
  BOTTOM w0.203: R31.1 46.16,7.36 J5.4
N115355295: length 5.6
  BOTTOM w0.203: J5.3 43.16,4.38 R30.2
N116292693: length 2.6
  TOP w0.203: U2.1 v1(17.15,73.85)
  BOTTOM w0.203: C3.2 17.15,74.39 v1(17.15,73.85)
N117249130: length 2.3
  BOTTOM w0.254: D9.1 39.67,16 U9.1
